# Altium PCB PCB1.PcbDoc (part 1 of 3)
Units mm, origin at the board's own origin, x right, y up, seen from the top; angles counter-clockwise.
Board outline 144.5 x 134 mm, 4 copper layers ([L1] Top, [L2] GND, [L3] POWER, [L4] BOTTOM), stack 1.584 mm thick; 275 components, 215 nets, 860 pads, 1046 vias.
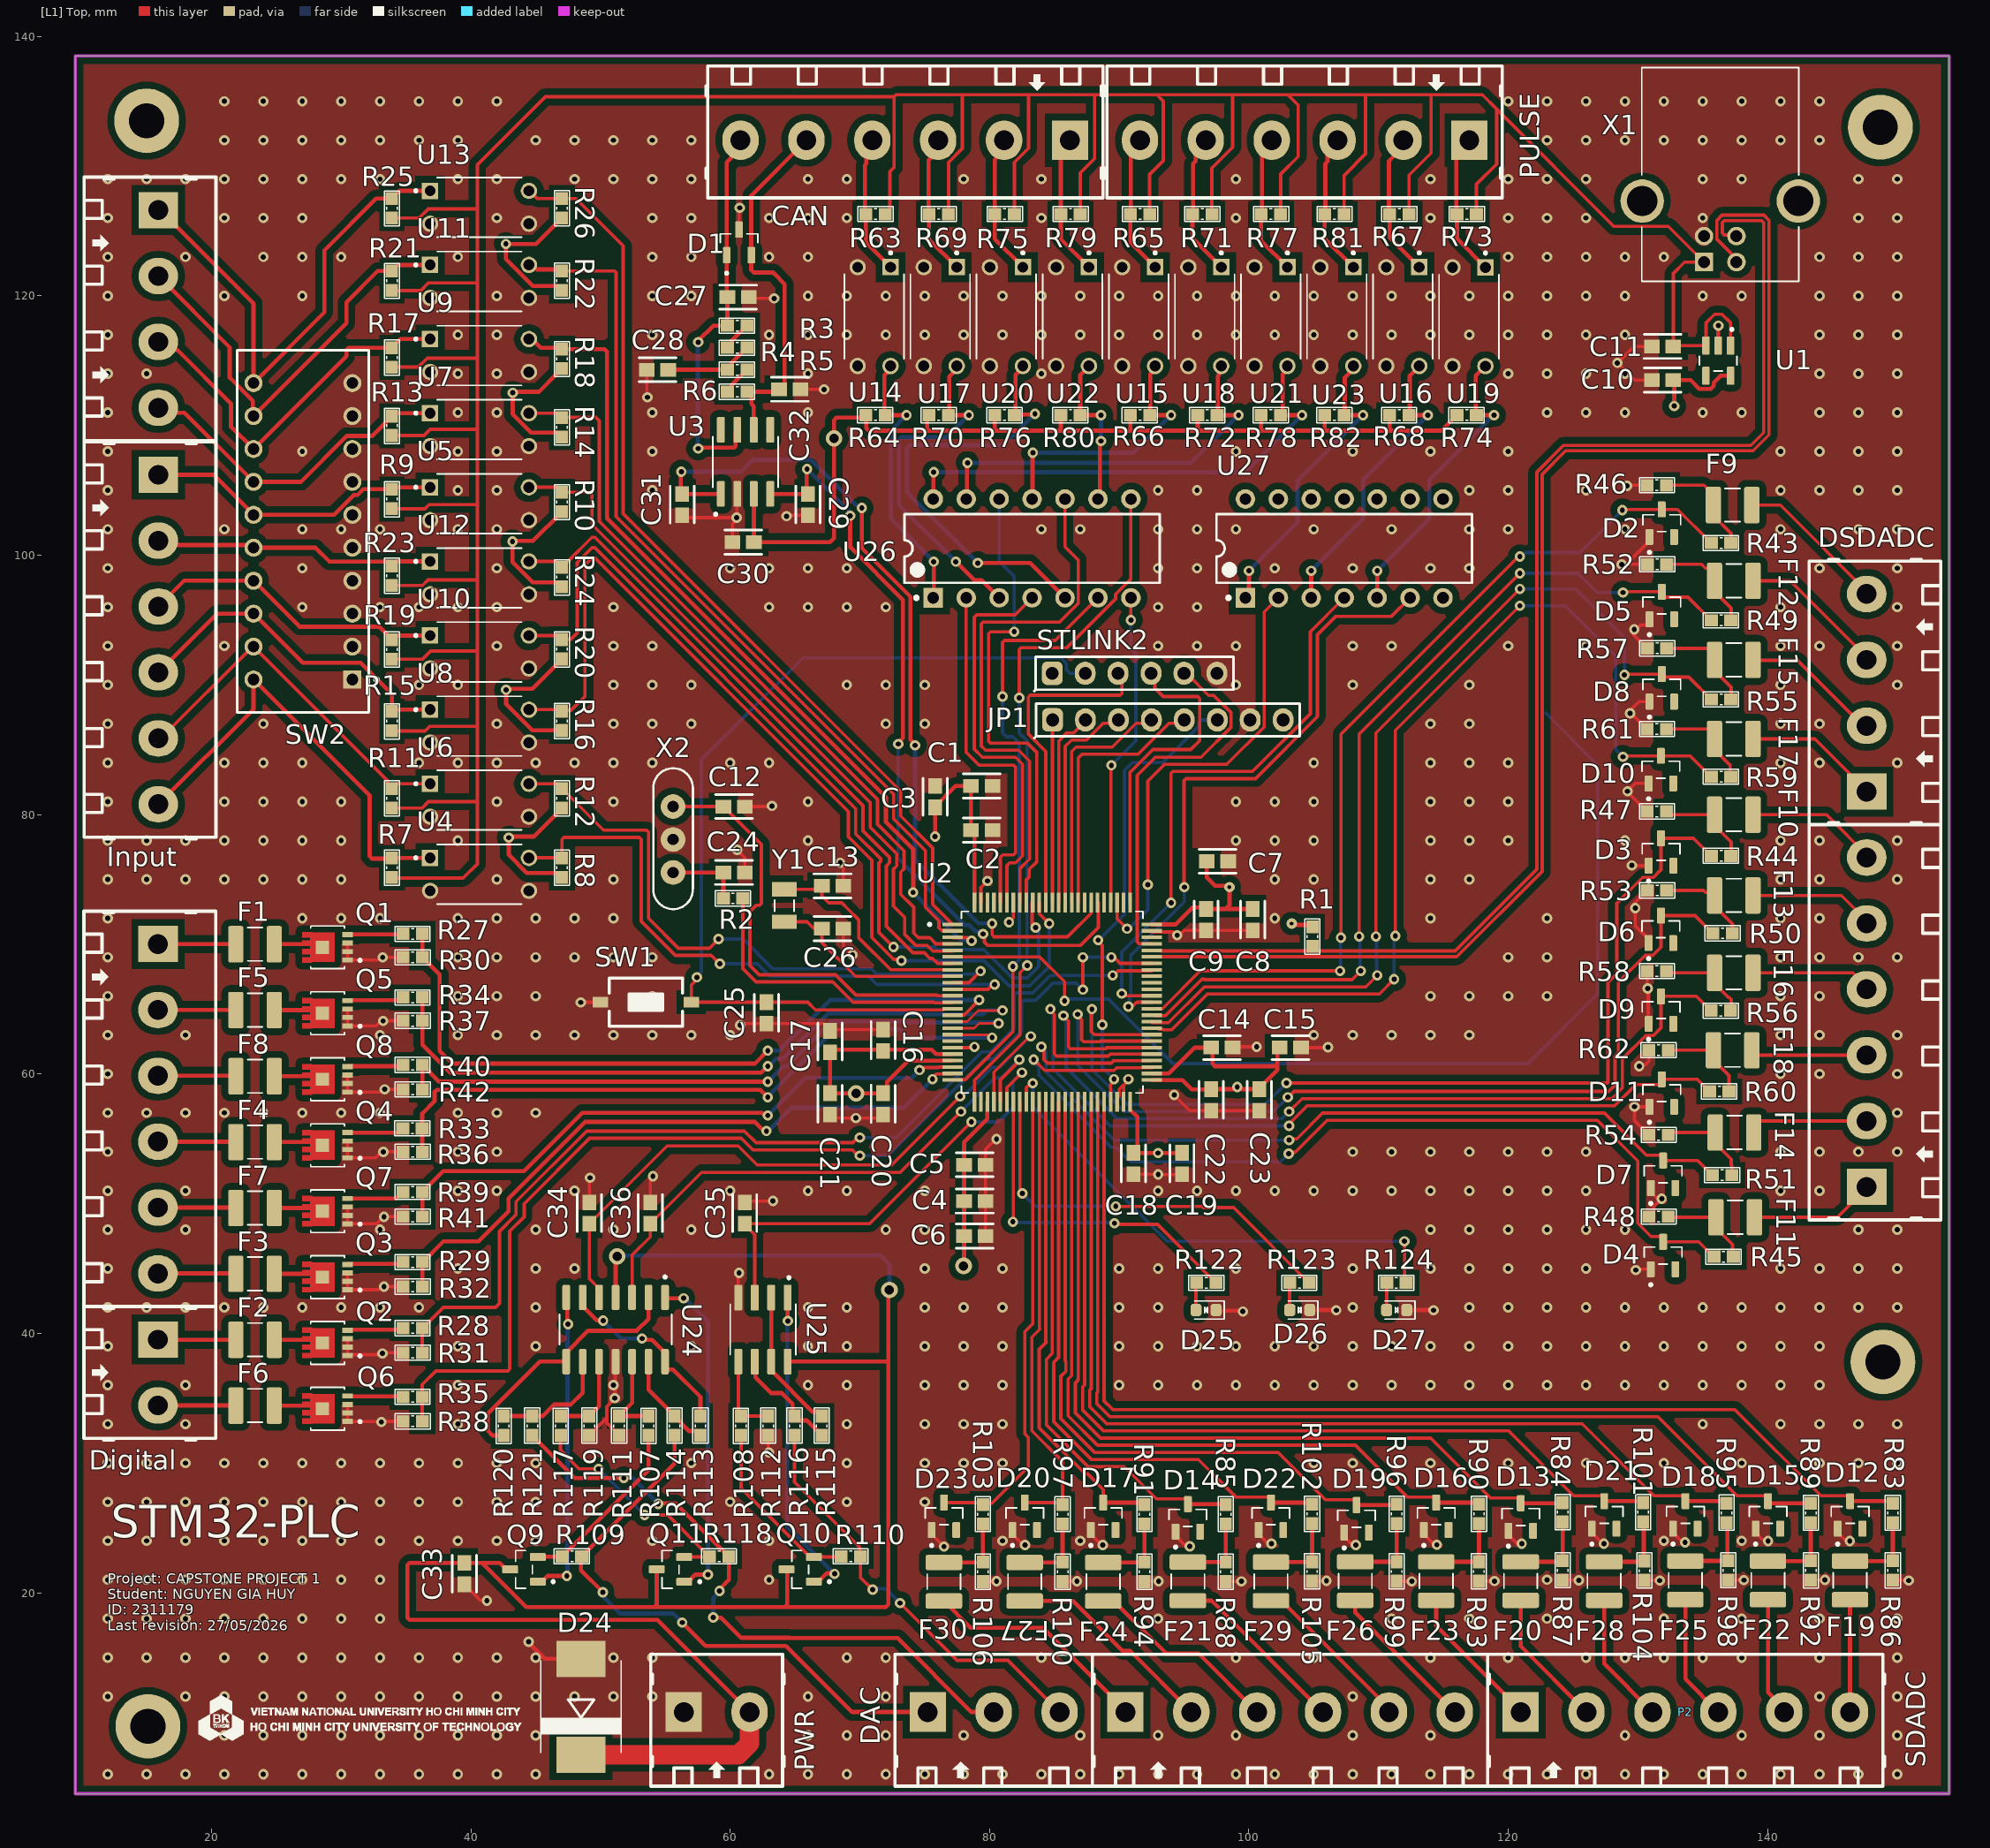
[diagram p0: [L1] Top view]
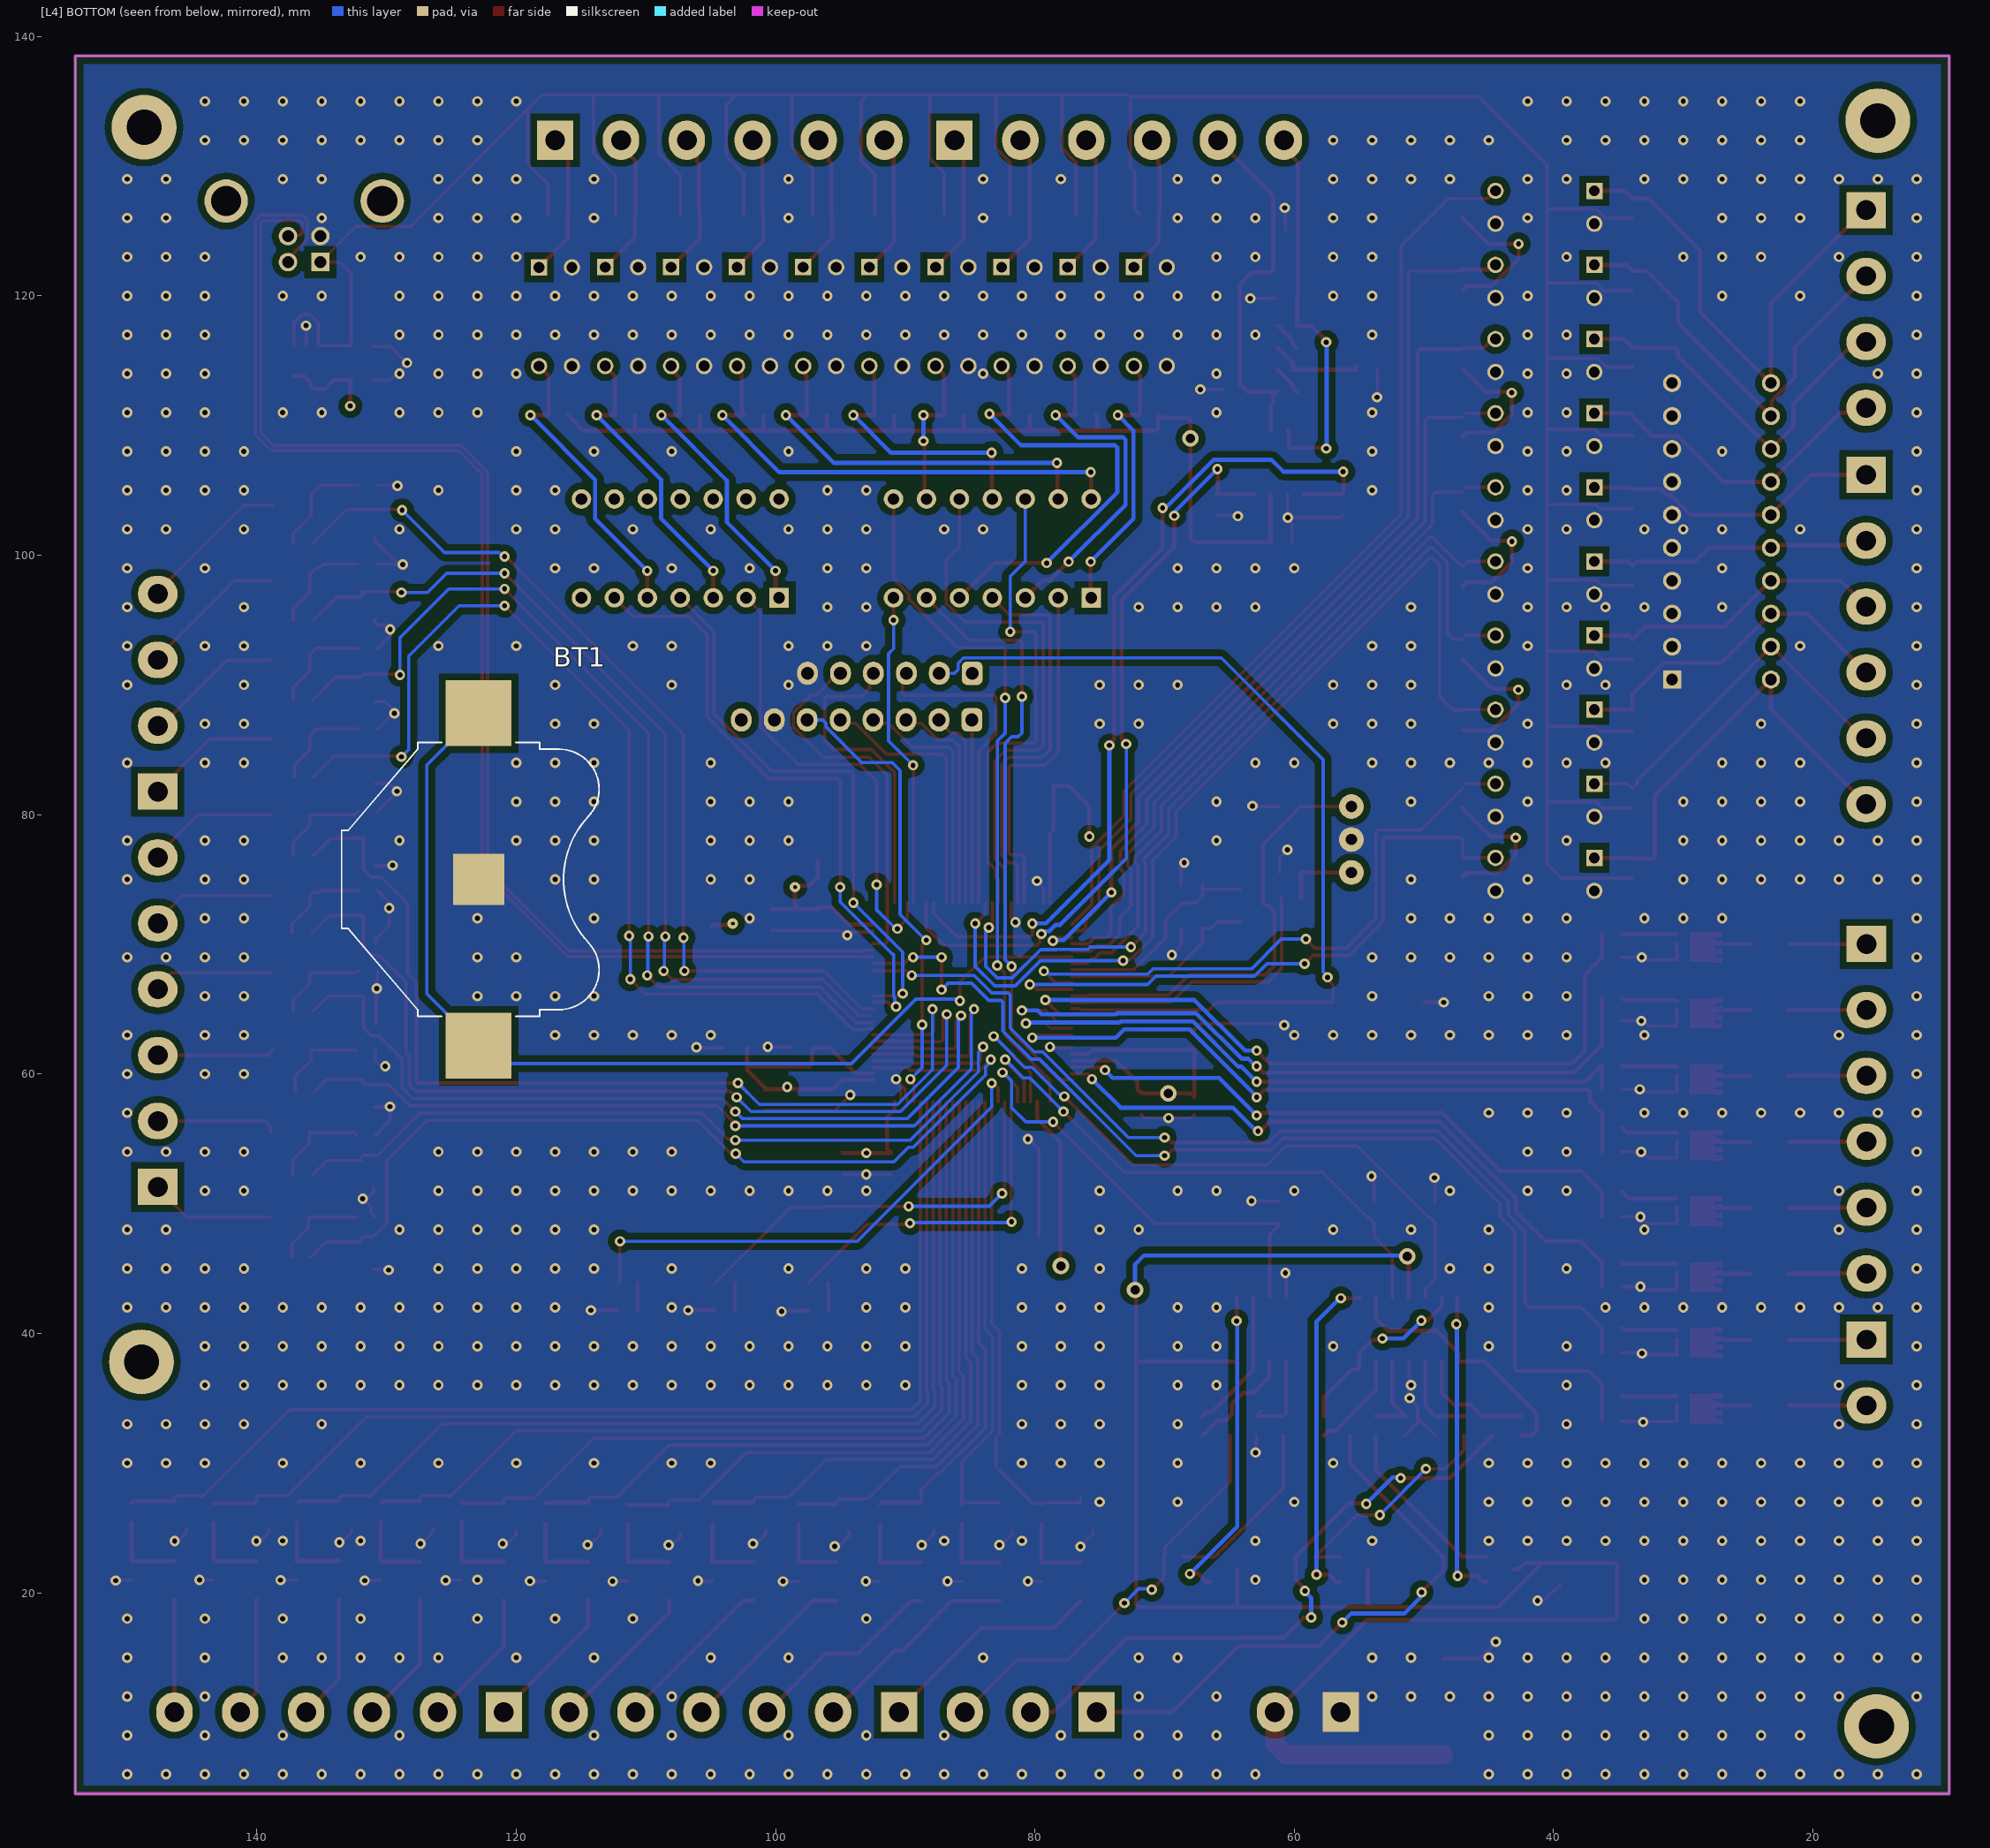
[diagram p1: [L4] BOTTOM view, seen from below]
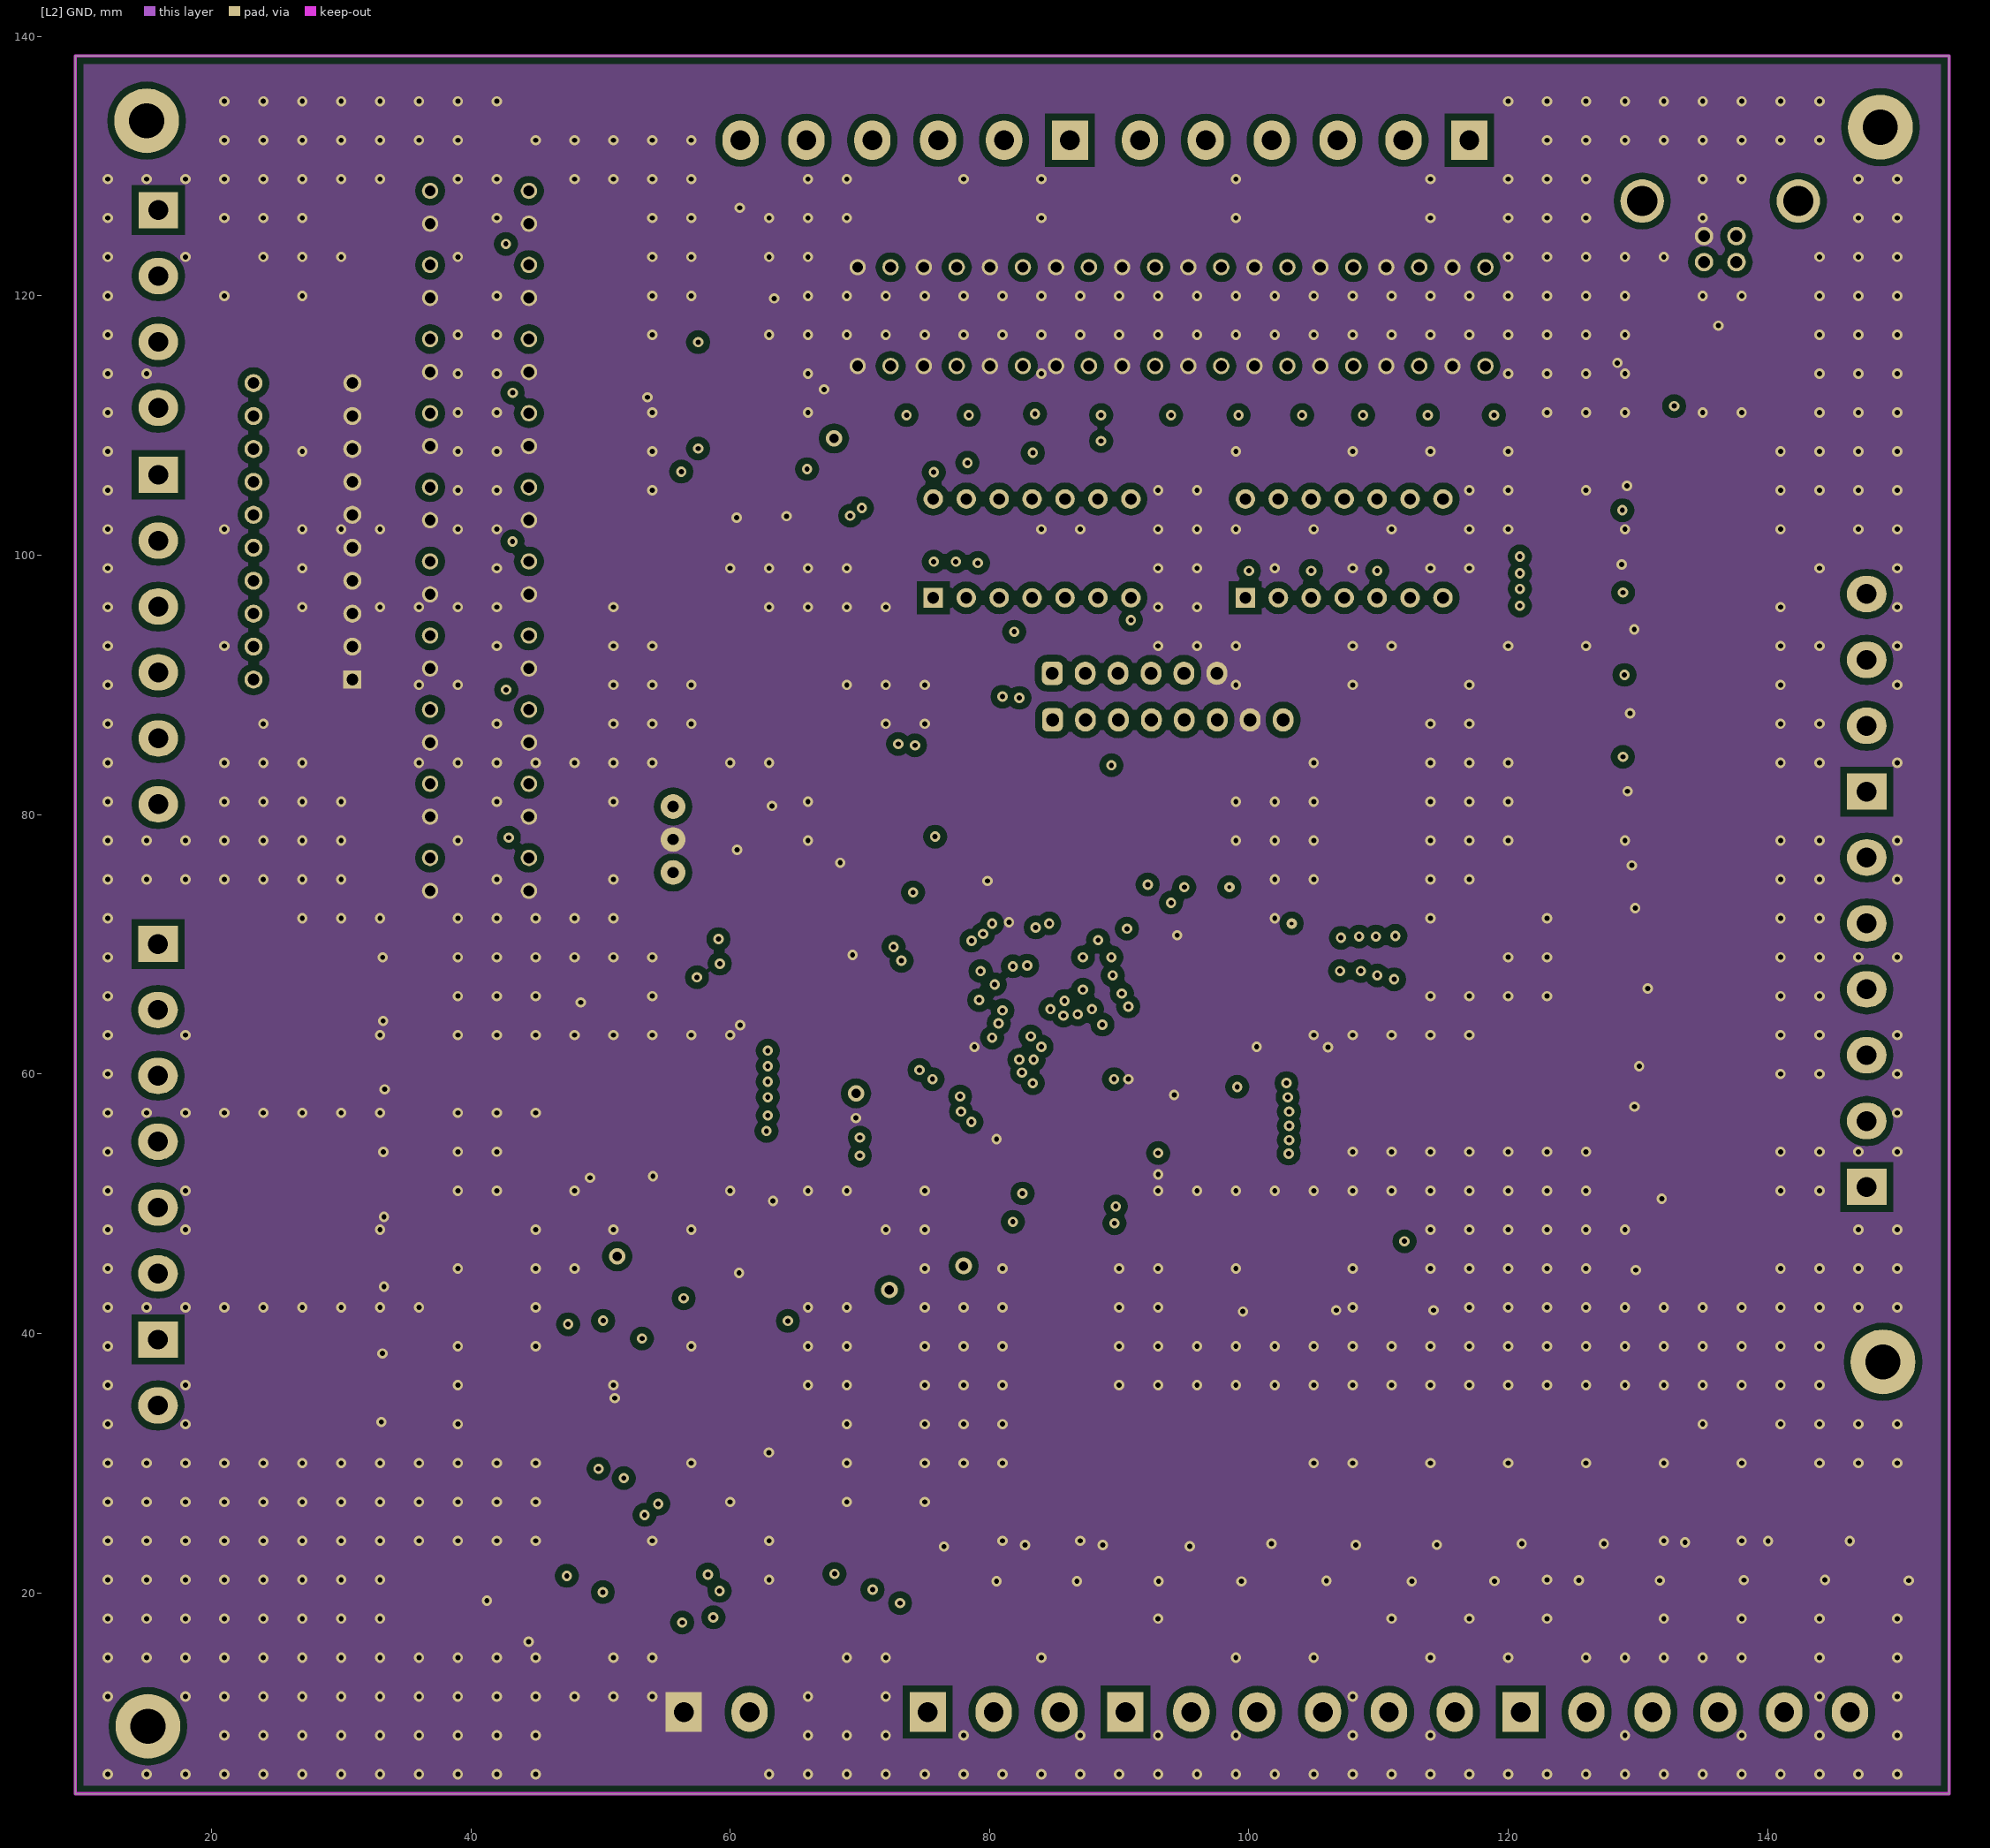
[diagram p2: [L2] GND]
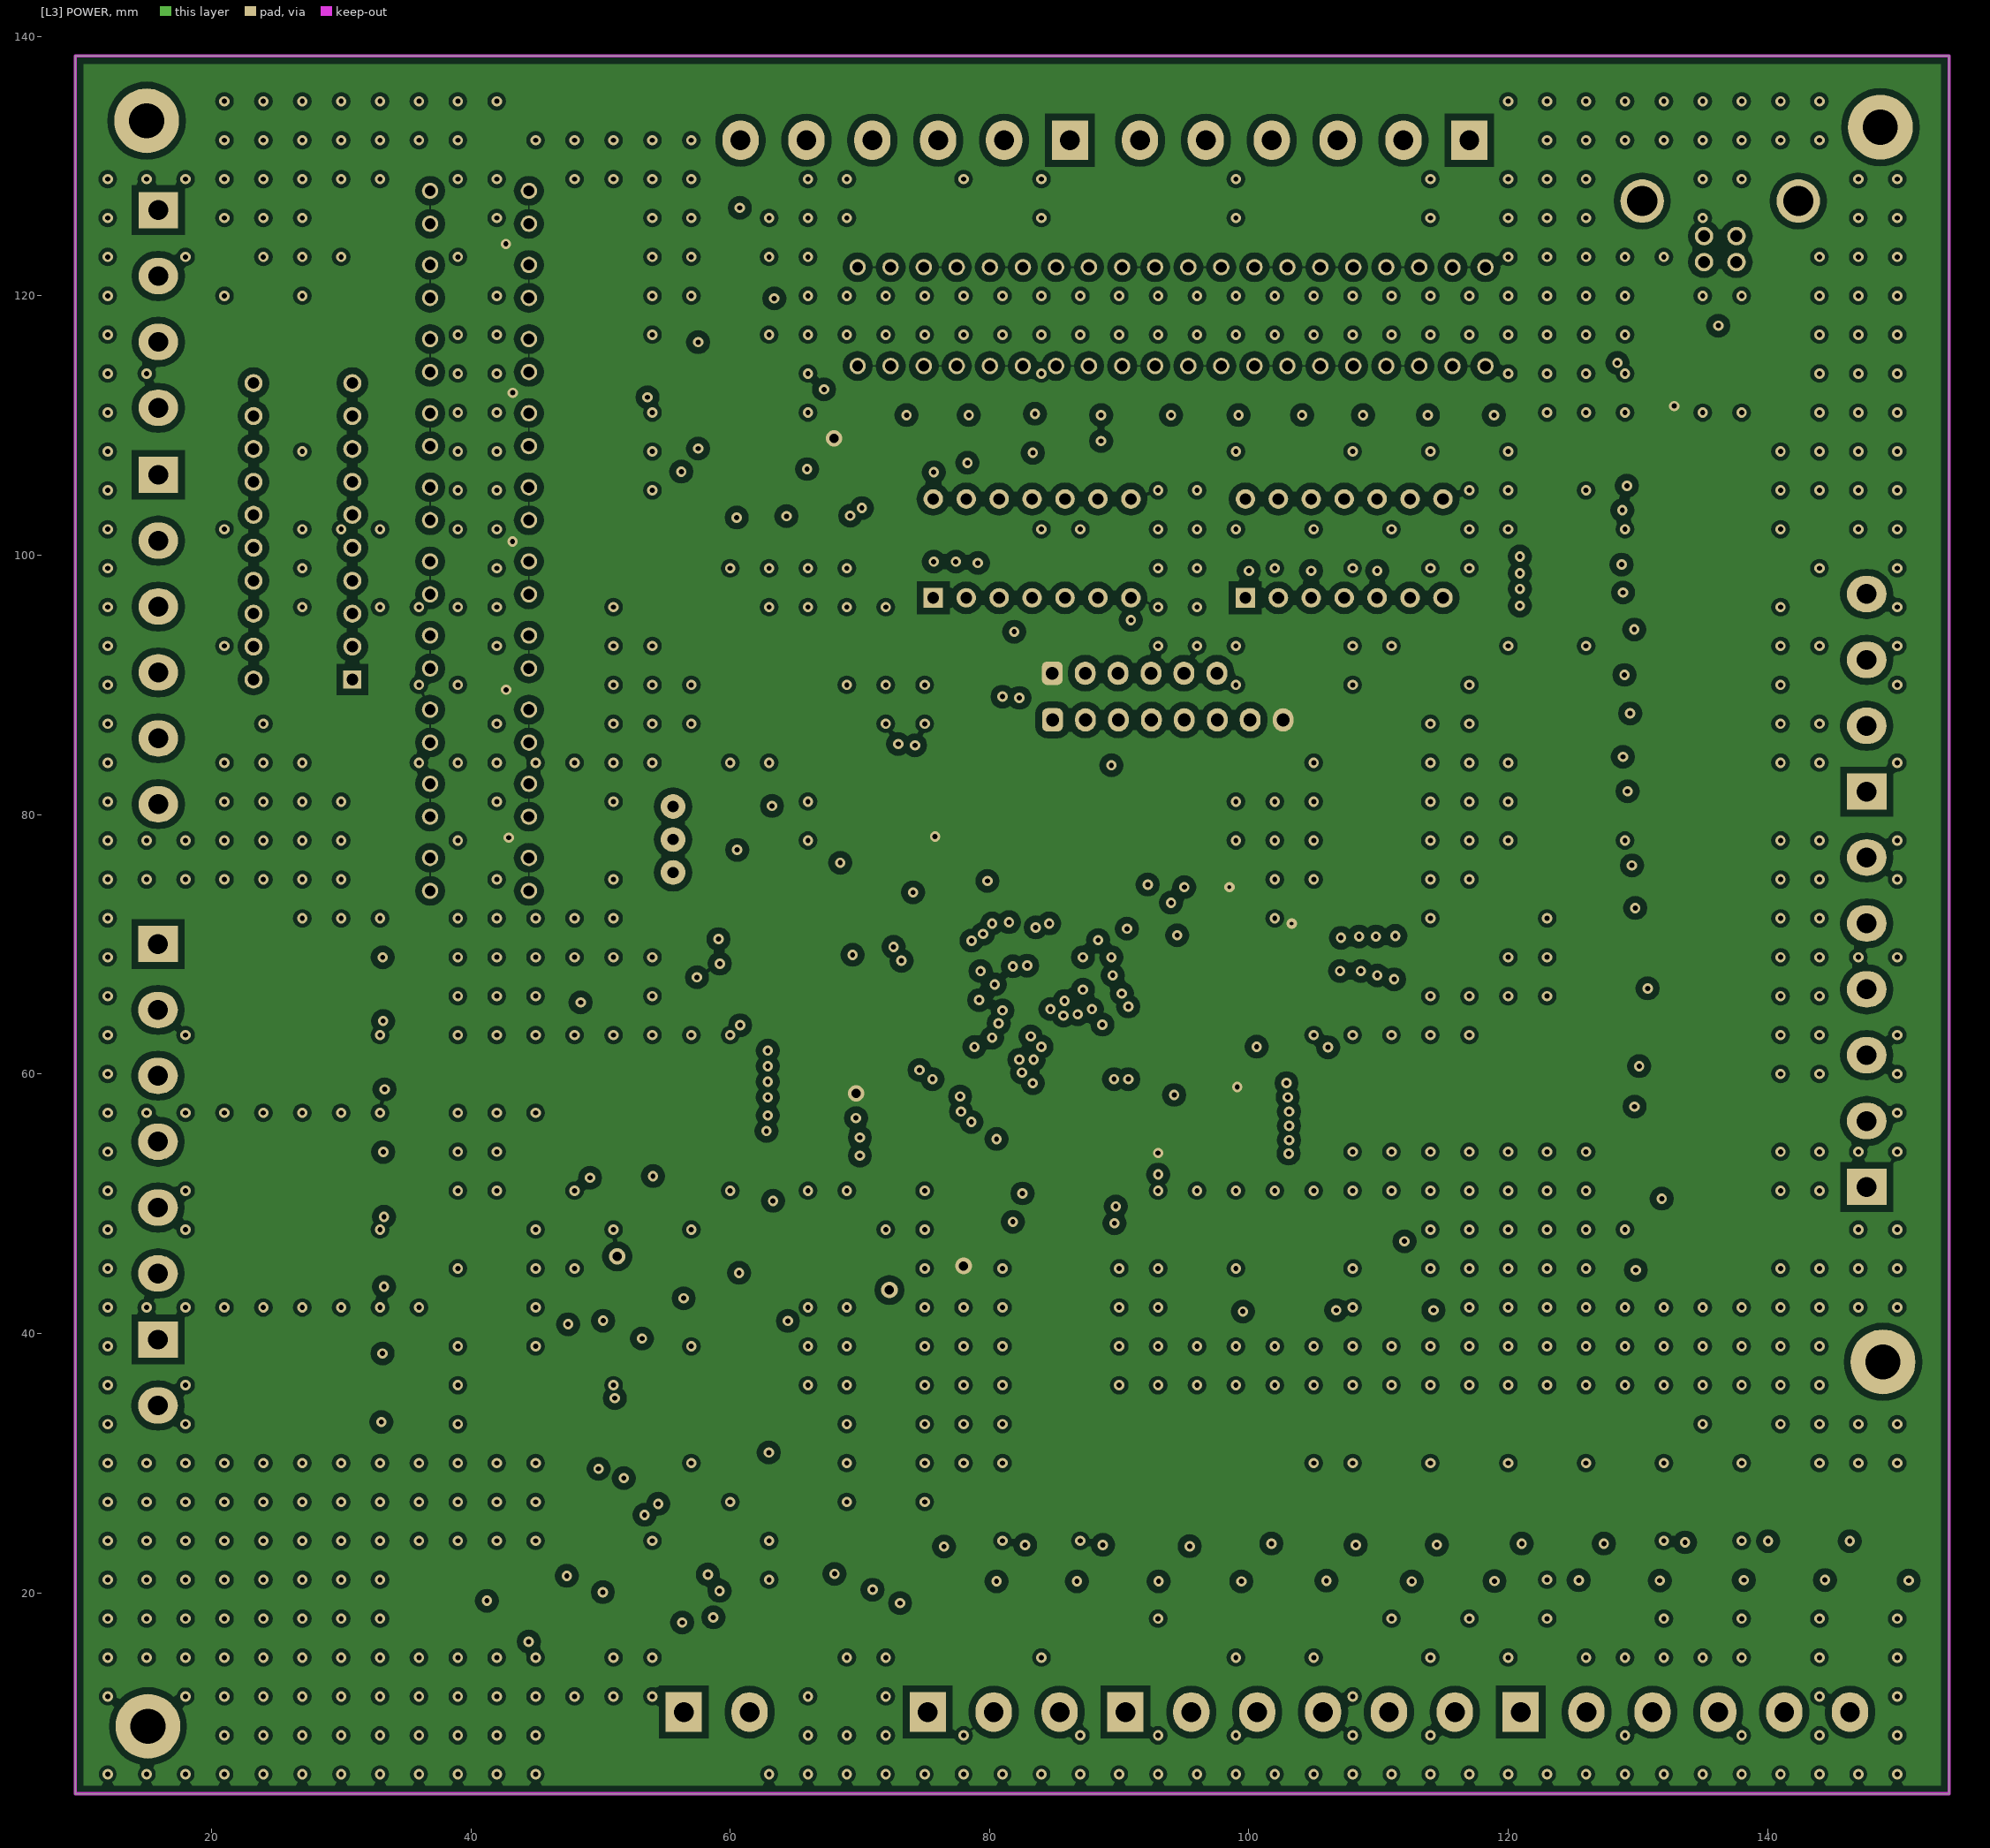
[diagram p3: [L3] POWER]

## Layer stack, top to bottom
Top Solder: solder mask 0.012, Solder Resist, Dk 4
[L1] Top: signal copper 0.04
Dielectric 1: prepreg 0.2, PP-006, Dk 4.5
[L2] GND: signal copper 0.032
Dielectric 2: dielectric 1.04, FR-4, Dk 4.6
[L3] POWER: signal copper 0.032
Dielectric 3: prepreg 0.2, PP-006, Dk 4.5
[L4] BOTTOM: signal copper 0.04
Bottom Solder: solder mask 0.012, Solder Resist, Dk 4

## Board outline
9.5,4.5 154,4.5 154,138.5 9.5,138.5

## Design rules (kind name [scope] priority, off if disabled: settings)
Clearance "Stitching GND_1" [IsStitchingVia and InNet('GND') vs (IsVia and (Not IsStitchingVia)) Or IsPad] p1: gap=0.127 ignorepadtopadclearanceinfootprint=FALSE
Clearance "Stitching GND" [IsStitchingVia and InNet('GND')] p2: gap=0.3 ignorepadtopadclearanceinfootprint=FALSE
Clearance "Clearence 0,508_Polygon" [InNamedPolygon('F.Cu-GND') OR InNamedPolygon('In1.Cu-GND') OR InNamedPolygon('In2.Cu-+3V3') OR InNamedPolygon('B.Cu-GND')] p3: gap=0.508 ignorepadtopadclearanceinfootprint=FALSE
DiffPairsRouting [All] p1: maxlimit=0.254 minlimit=0.254 mostfreqgap=0.254 toplayer_minwidth=0.381 toplayer_maxwidth=0.381 toplayer_prefwidth=0.381 midlayer1_minwidth=0.381 midlayer1_maxwidth=0.381 midlayer1_prefwidth=0.381 midlayer2_minwidth=0.381 midlayer2_maxwidth=0.381 midlayer2_prefwidth=0.381 bottomlayer_minwidth=0.381 bottomlayer_maxwidth=0.381 bottomlayer_prefwidth=0.381 maxuncoupledlength=12.7
HoleSize HoleSize_1 [All] p1: absolutevalues=TRUE maxlimit=2.7 minlimit=0.025 maxpercent=80.000 minpercent=20.000
MinimumSolderMaskSliver [All] p1: minsoldermaskwidth=0
PolygonConnect Polygon_B.Cu-GND_ConnectDirect [IsNamedPolygon('B.Cu-GND')] p1: connectstyle=Direct reliefconductorwidth=0.254 reliefentries=4 polygonreliefangle="90 Angle" airgapwidth=0.254
PolygonConnect Polygon_In2.Cu-+3V3_ConnectDirect [IsNamedPolygon('In2.Cu-+3V3')] p2: connectstyle=Direct reliefconductorwidth=0.254 reliefentries=4 polygonreliefangle="90 Angle" airgapwidth=0.254
PolygonConnect Polygon_In1.Cu-GND_ConnectDirect [IsNamedPolygon('In1.Cu-GND')] p3: connectstyle=Direct reliefconductorwidth=0.254 reliefentries=4 polygonreliefangle="90 Angle" airgapwidth=0.254
PolygonConnect Polygon_F.Cu-GND_ConnectDirect [IsNamedPolygon('F.Cu-GND')] p4: connectstyle=Direct reliefconductorwidth=0.254 reliefentries=4 polygonreliefangle="90 Angle" airgapwidth=0.254
RoutingVias [All] p1: holewidth=0.711 width=1.27 viastyle="Through Hole" minholewidth=0.4 minwidth=0.8 maxholewidth=0.711 maxwidth=1.27
SilkToSilkClearance [All] p1: silktosilkclearance=0
SilkToSolderMaskClearance [IsPad] p1: minsilkscreentomaskgap=0 clearancetoexposedcopper=TRUE
SolderMaskExpansion [All] p1: expansion=0.102 istentingtop=FALSE
Width [All] p1: maxlimit=10 minlimit=0.2 preferedwidth=0.25 minimp=50.000000 maximp=50.000000 favimp=50.000000
25 further rules are at their usual default settings.

## Classes and differential pairs
component class SDADC: D12 D13 D14 D15 D16 D17 D18 D19 D20 D21 D22 D23 F19 F20 F21 F22 F23 F24 F25 F26 F27 F28 F29 F30 R83 R84 R85 R86 R87 R88 R89 R90 R91 R92 R93 R94 R95 R96 R97 R98 R99 R100 R101 R102 R103 R104 R105 R106
component class PULSE: R63 R64 R65 R66 R67 R68 R69 R70 R71 R72 R73 R74 R75 R76 R77 R78 R79 R80 R81 R82 U14 U15 U16 U17 U18 U19 U20 U21 U22 U23 U26 U27
component class LED: D25 D26 D27 R122 R123 R124
component class INPUT: R7 R8 R9 R10 R11 R12 R13 R14 R15 R16 R17 R18 R19 R20 R21 R22 R23 R24 R25 R26 SW2 U4 U5 U6 U7 U8 U9 U10 U11 U12 U13
component class DSDADC: D2 D3 D4 D5 D6 D7 D8 D9 D10 D11 F9 F10 F11 F12 F13 F14 F15 F16 F17 F18 R43 R44 R45 R46 R47 R48 R49 R50 R51 R52 R53 R54 R55 R56 R57 R58 R59 R60 R61 R62
component class DIGTITAL: F1 F2 F3 F4 F5 F6 F7 F8 Q1 Q2 Q3 Q4 Q5 Q6 Q7 Q8 R27 R28 R29 R30 R31 R32 R33 R34 R35 R36 R37 R38 R39 R40 R41 R42
component class DAC: C33 C34 C35 C36 D24 Q9 Q10 Q11 R107 R108 R109 R110 R111 R112 R113 R114 R115 R116 R117 R118 R119 R120 R121 U25
component class STM32_PLC: BT1 C1 C2 C3 C4 C5 C6 C7 C8 C9 C10 C11 C12 C13 C14 C15 C16 C17 C18 C19 C20 C21 C22 C23 C24 C25 C26 JP1 R1 R2 SDADC STLINK2 SW1 U1 U2 USB X2 Y1
component class CAN: C27 C28 C29 C30 C31 C32 D1 R3 R4 R5 R6 U3
differential pair USB: +USB_P -USB_N

## Components (designator, comment, footprint, x,y, rotation, side; value= is the part's Value field where it differs from the comment)
BT1 "3002" BAT_3002 122.9,75 r270 bottom
C1 "100nF" FP-C0603C-CF-IPC_A 79.4,82.2 r180 top value=104
C2 "100nF" FP-C0603C-CF-IPC_A 79.4,78.8 r180 top value=104
C3 "4.7uF" FP-C0603C-CF-IPC_A 75.8,81.374 r270 top value=104
C4 "100nF" FP-C0603C-CF-IPC_A 78.862,50.2 r180 top value=104
C5 "100nF" FP-C0603C-CF-IPC_A 78.862,53 r180 top value=104
C6 "4.7uF" FP-C0603C-CF-IPC_A 78.862,47.5 r180 top value=104
C7 "100nF" FP-C0603C-CF-IPC_A 97.574,76.4 r180 top value=104
C8 "100nF" FP-C0603C-CF-IPC_A 100.3,71.9 r90 top value=104
C9 "4.7uF" FP-C0603C-CF-IPC_A 96.7,71.9 r90 top value=104
C10 "1uF" FP-C0603C-CF-IPC_A 131.9,113.5 r0 top value=104
C11 "1uF" FP-C0603C-CF-IPC_A 131.9,116.1 r0 top value=104
C12 "10pF" FP-C0603C-CF-IPC_A 60.3,80.618 r0 top value=104
C13 "4,7pF" FP-C0603C-CF-IPC_A 67.9,74.5 r0 top value=104
C14 "10nF" FP-C0603C-CF-IPC_A 97.926,62.032 r180 top value=104
C15 "1uF" FP-C0603C-CF-IPC_A 103.2,62.032 r180 top value=104
C16 "10nF" FP-C0603C-CF-IPC_A 71.8,62.6 r270 top value=104
C17 "1uF" FP-C0603C-CF-IPC_A 67.7,62.5 r270 top value=104
C18 "10nF" FP-C0603C-CF-IPC_A 91.1,53.1 r90 top value=104
C19 "1uF" FP-C0603C-CF-IPC_A 94.836,53.1 r90 top value=104
C20 "10nF" FP-C0603C-CF-IPC_A 71.8,57.7 r90 top value=104
C21 "1uF" FP-C0603C-CF-IPC_A 67.7,57.7 r90 top value=104
C22 "10nF" FP-C0603C-CF-IPC_A 97.1,58 r90 top value=104
C23 "1uF" FP-C0603C-CF-IPC_A 100.8,58 r90 top value=104
C24 "10pF" FP-C0603C-CF-IPC_A 60.3,75.538 r0 top value=104
C25 "100nF" FP-C0603C-CF-IPC_A 62.8,64.706 r270 top value=104
C26 "4,7pF" FP-C0603C-CF-IPC_A 67.9,71.2 r0 top value=104
C27 "10nF" FP-C0603C-CF-IPC_A 60.615,119.897 r180 top value=104
C28 "10nF" FP-C0603C-CF-IPC_A 54.4,114.3 r0 top value=104
C29 "10nF" FP-C0603C-CF-IPC_A 66,103.901 r270 top value=104
C30 "10nF" FP-C0603C-CF-IPC_A 60.996,101 r0 top value=104
C31 "10nF" FP-C0603C-CF-IPC_A 56.3,103.901 r90 top value=104
C32 "10nF" FP-C0603C-CF-IPC_A 64.6,112.8 r180 top value=104
C33 "100nF" FP-C0603C-CF-IPC_A 39.5,21.476 r270 top value=104
C34 "100nF" FP-C0603C-CF-IPC_A 49.135,49.273 r90 top value=104
C35 "100nF" FP-C0603C-CF-IPC_A 61.12,49.273 r90 top value=104
C36 "100nF" FP-C0603C-CF-IPC_A 53.835,49.273 r90 top value=104
CAN "Screw_terminal 1x6" HDR/Terminal/6 73.5,132 r180 top (schematic designator P1)
D1 "PESD5V0L2BT,215" SOT95P230X110-3N 60.679,124.124 r90 top
D2 "BZX84C3V6LT1G" SOT95P240X111-3N 131.843,102.47 r90 top
D3 "BZX84C3V6LT1G" SOT95P240X111-3N 131.782,77.114 r90 top
D4 "BZX84C3V6LT1G" SOT95P240X111-3N 131.943,46 r90 top
D5 "BZX84C3V6LT1G" SOT95P240X111-3N 131.843,96.12 r90 top
D6 "BZX84C3V6LT1G" SOT95P240X111-3N 131.777,71.145 r90 top
D7 "BZX84C3V6LT1G" SOT95P240X111-3N 131.943,52.265 r90 top
D8 "BZX84C3V6LT1G" SOT95P240X111-3N 131.843,89.77 r90 top
D9 "BZX84C3V6LT1G" SOT95P240X111-3N 131.782,64.922 r90 top
D10 "BZX84C3V6LT1G" SOT95P240X111-3N 131.777,83.464 r90 top
D11 "BZX84C3V6LT1G" SOT95P240X111-3N 131.843,58.528 r90 top
D12 "BZX84C3V6LT1G" SOT95P240X111-3N 146.36,26 r90 top
D13 "BZX84C3V6LT1G" SOT95P240X111-3N 120.96,25.839 r90 top
D14 "BZX84C3V6LT1G" SOT95P240X111-3N 95.296,25.77 r90 top
D15 "BZX84C3V6LT1G" SOT95P240X111-3N 140.029,26 r90 top
D16 "BZX84C3V6LT1G" SOT95P240X111-3N 114.446,25.89 r90 top
D17 "BZX84C3V6LT1G" SOT95P240X111-3N 88.765,25.89 r90 top
D18 "BZX84C3V6LT1G" SOT95P240X111-3N 133.66,26 r90 top
D19 "BZX84C3V6LT1G" SOT95P240X111-3N 108.3,25.7 r90 top
D20 "BZX84C3V6LT1G" SOT95P240X111-3N 82.715,25.89 r90 top
D21 "BZX84C3V6LT1G" SOT95P240X111-3N 127.4,26 r90 top
D22 "BZX84C3V6LT1G" SOT95P240X111-3N 101.7,25.89 r90 top
D23 "BZX84C3V6LT1G" SOT95P240X111-3N 76.484,25.89 r90 top
D24 "B560C-13-F" SMC 48.5,11.2 r90 top
D25 "LED_USB_RX_TX" WL-SMCW_0603_150060xx75000 96.7,41.8 r180 top
D26 "LED_CAN_RX_TX" WL-SMCW_0603_150060xx75000 103.923,41.8 r180 top
D27 "LED_ERROR" WL-SMCW_0603_150060xx75000 111.4,41.8 r180 top
DAC "Screw_terminal 1x3" HDR/Terminal/3 80.32,10.8 r0 top (schematic designator P4)
Digital "Screw_terminal 1x6" HDR/Terminal/6 15.876,57.318 r270 top (schematic designator P6)
DSDADC "Screw_terminal 1x4" HDR/Terminal/4 147.645,89.389 r90 top (schematic designator P5)
F1 "0ZCH0150FF2E" FUSC3225X90N 23.358,70.006 r0 top
F2 "0ZCH0150FF2E" FUSC3225X90N 23.358,39.506 r0 top
F3 "0ZCH0150FF2E" FUSC3225X90N 23.358,44.586 r0 top
F4 "0ZCH0150FF2E" FUSC3225X90N 23.358,54.746 r0 top
F5 "0ZCH0150FF2E" FUSC3225X90N 23.358,64.926 r0 top
F6 "0ZCH0150FF2E" FUSC3225X90N 23.358,34.426 r0 top
F7 "0ZCH0150FF2E" FUSC3225X90N 23.358,49.666 r0 top
F8 "0ZCH0150FF2E" FUSC3225X90N 23.358,59.826 r0 top
F9 "0ZCH0150FF2E" FUSC3225X90N 137.304,103.867 r0 top
F10 "0ZCH0150FF2E" FUSC3225X90N 137.392,79.991 r0 top
F11 "0ZCH0150FF2E" FUSC3225X90N 137.504,48.953 r0 top
F12 "0ZCH0150FF2E" FUSC3225X90N 137.392,98.025 r0 top
F13 "0ZCH0150FF2E" FUSC3225X90N 137.392,73.768 r0 top
F14 "0ZCH0150FF2E" FUSC3225X90N 137.443,55.484 r0 top
F15 "0ZCH0150FF2E" FUSC3225X90N 137.392,91.929 r0 top
F16 "0ZCH0150FF2E" FUSC3225X90N 137.392,67.799 r0 top
F17 "0ZCH0150FF2E" FUSC3225X90N 137.392,85.833 r0 top
F18 "0ZCH0150FF2E" FUSC3225X90N 137.304,61.83 r0 top
F19 "0ZCH0150FF2E" FUSC3225X90N 146.36,20.954 r270 top
F20 "0ZCH0150FF2E" FUSC3225X90N 120.96,20.9 r270 top
F21 "0ZCH0150FF2E" FUSC3225X90N 95.296,20.873 r270 top
F22 "0ZCH0150FF2E" FUSC3225X90N 140.029,20.954 r270 top
F23 "0ZCH0150FF2E" FUSC3225X90N 114.446,20.9 r270 top
F24 "0ZCH0150FF2E" FUSC3225X90N 88.765,20.846 r270 top
F25 "0ZCH0150FF2E" FUSC3225X90N 133.66,20.961 r270 top
F26 "0ZCH0150FF2E" FUSC3225X90N 108.2,20.9 r270 top
F27 "0ZCH0150FF2E" FUSC3225X90N 82.715,20.846 r270 top
F28 "0ZCH0150FF2E" FUSC3225X90N 127.4,20.9 r270 top
F29 "0ZCH0150FF2E" FUSC3225X90N 101.7,20.873 r270 top
F30 "0ZCH0150FF2E" FUSC3225X90N 76.484,20.846 r270 top
Input "Screw_terminal 1x6" HDR/Terminal/6 15.9,93.5 r270 top (schematic designator P11)
JP1 "JP8" HDR/Header/8 93.75,87.3 r0 top value="Connector 8"
P2 "Screw_terminal 1x6" HDR/Terminal/6 133.66,10.8 r0 top
P8 "Screw_terminal 1x6" HDR/Terminal/6 147.645,63.989 r90 top
P9 "Screw_terminal 1x2" HDR/Terminal/2 15.876,36.978 r270 top
P10 "Screw_terminal 1x4" HDR/Terminal/4 15.9,118.988 r270 top
PULSE "Screw_terminal 1x6" HDR/Terminal/6 104.3,132 r180 top (schematic designator P7)
PWR "Screw_terminal 1x2" HDR/Terminal/2 58.96,10.8 r0 top (schematic designator P12)
Q1 "BUK9M15-60EX" TRANS_BUK9M15-60EX 28.954,69.762 r180 top
Q2 "BUK9M15-60EX" TRANS_BUK9M15-60EX 28.954,39.262 r180 top
Q3 "BUK9M15-60EX" TRANS_BUK9M15-60EX 28.954,44.342 r180 top
Q4 "BUK9M15-60EX" TRANS_BUK9M15-60EX 28.954,54.502 r180 top
Q5 "BUK9M15-60EX" TRANS_BUK9M15-60EX 28.954,64.682 r180 top
Q6 "BUK9M15-60EX" TRANS_BUK9M15-60EX 28.954,34.194 r180 top
Q7 "BUK9M15-60EX" TRANS_BUK9M15-60EX 28.954,49.422 r180 top
Q8 "BUK9M15-60EX" TRANS_BUK9M15-60EX 28.954,59.582 r180 top
Q9 "BC847C-QR" SOT95P240X111-3N 44.1,21.8 r180 top
Q10 "BC847C-QR" SOT95P240X111-3N 65.4,21.8 r180 top
Q11 "BC847C-QR" SOT95P240X111-3N 55.4,21.8 r180 top
R1 "1,5k" "tro smd 0603" 104.9,70.6 r270 top
R2 "2k" "tro smd 0603" 60.224,73.538 r180 top
R3 "0" "tro smd 0603" 60.539,117.7 r180 top
R4 "60" "tro smd 0603" 60.539,116 r180 top
R5 "0" "tro smd 0603" 60.539,114.3 r180 top
R6 "60" "tro smd 0603" 60.539,112.6 r180 top
R7 "1k" "tro smd 0603" 33.915,75.912 r270 top
R8 "1k" "tro smd 0603" 47.025,75.912 r270 top
R9 "1k" "tro smd 0603" 33.915,104.333 r270 top
R10 "1k" "tro smd 0603" 47.025,104.103 r270 top
R11 "1k" "tro smd 0603" 33.915,81.253 r270 top
R12 "1k" "tro smd 0603" 47.025,81.253 r270 top
R13 "1k" "tro smd 0603" 33.915,109.983 r270 top
R14 "1k" "tro smd 0603" 47.025,109.868 r270 top
R15 "1k" "tro smd 0603" 33.915,87.203 r270 top
R16 "1k" "tro smd 0603" 47.025,87.227 r270 top
R17 "1k" "tro smd 0603" 33.915,115.25 r270 top
R18 "1k" "tro smd 0603" 47.025,115.135 r270 top
R19 "1k" "tro smd 0603" 33.915,92.736 r270 top
R20 "1k" "tro smd 0603" 47.025,92.748 r270 top
R21 "1k" "tro smd 0603" 33.915,121.161 r270 top
R22 "1k" "tro smd 0603" 47.025,121.173 r270 top
R23 "1k" "tro smd 0603" 33.915,98.421 r270 top
R24 "1k" "tro smd 0603" 47.025,98.306 r270 top
R25 "1k" "tro smd 0603" 33.915,126.75 r270 top
R26 "1k" "tro smd 0603" 47.025,126.762 r270 top
R27 "160" "tro smd 0603" 35.51,70.8 r180 top
R28 "160" "tro smd 0603" 35.51,40.4 r180 top
R29 "160" "tro smd 0603" 35.51,45.5 r180 top
R30 "10k" "tro smd 0603" 35.51,69 r0 top
R31 "10k" "tro smd 0603" 35.51,38.5 r0 top
R32 "10k" "tro smd 0603" 35.51,43.6 r0 top
R33 "160" "tro smd 0603" 35.5,55.8 r180 top
R34 "160" "tro smd 0603" 35.51,65.9 r180 top
R35 "160" "tro smd 0603" 35.51,35.1 r180 top
R36 "10k" "tro smd 0603" 35.51,54 r0 top
R37 "10k" "tro smd 0603" 35.51,64.1 r0 top
R38 "10k" "tro smd 0603" 35.51,33.219 r0 top
R39 "160" "tro smd 0603" 35.51,50.9 r180 top
R40 "160" "tro smd 0603" 35.51,60.7 r180 top
R41 "10k" "tro smd 0603" 35.51,49 r0 top
R42 "10k" "tro smd 0603" 35.51,58.8 r0 top
R43 "160" "tro smd 0603" 136.415,100.946 r180 top
R44 "160" "tro smd 0603" 136.415,76.816 r180 top
R45 "160" "tro smd 0603" 136.615,45.905 r180 top
R46 "160" "tro smd 0603" 131.462,105.391 r0 top
R47 "160" "tro smd 0603" 131.462,80.245 r0 top
R48 "160" "tro smd 0603" 131.6,49 r0 top
R49 "160" "tro smd 0603" 136.415,94.977 r180 top
R50 "160" "tro smd 0603" 136.53,70.847 r180 top
R51 "160" "tro smd 0603" 136.5,52.2 r180 top
R52 "160" "tro smd 0603" 131.474,99.295 r0 top
R53 "160" "tro smd 0603" 131.474,74.149 r0 top
R54 "160" "tro smd 0603" 131.6,55.3 r0 top
R55 "160" "tro smd 0603" 136.415,88.881 r180 top
R56 "160" "tro smd 0603" 136.403,64.878 r180 top
R57 "160" "tro smd 0603" 131.474,92.818 r0 top
R58 "160" "tro smd 0603" 131.462,67.926 r0 top
R59 "160" "tro smd 0603" 136.415,82.912 r180 top
R60 "160" "tro smd 0603" 136.276,58.655 r180 top
R61 "160" "tro smd 0603" 131.462,86.595 r0 top
R62 "160" "tro smd 0603" 131.589,61.83 r0 top
R63 "1k" "tro smd 0603" 71.2,126.3 r0 top
R64 "1k" "tro smd 0603" 71.2,110.8 r180 top
R65 "1k" "tro smd 0603" 91.6,126.3 r0 top
R66 "1k" "tro smd 0603" 91.6,110.8 r180 top
R67 "1k" "tro smd 0603" 111.6,126.3 r0 top
R68 "1k" "tro smd 0603" 111.6,110.8 r180 top
R69 "1k" "tro smd 0603" 76.085,126.3 r0 top
R70 "1k" "tro smd 0603" 76.085,110.8 r180 top
R71 "1k" "tro smd 0603" 96.4,126.3 r0 top
R72 "1k" "tro smd 0603" 96.8,110.8 r180 top
R73 "1k" "tro smd 0603" 116.8,126.3 r0 top
R74 "1k" "tro smd 0603" 116.8,110.8 r180 top
R75 "1k" "tro smd 0603" 81.165,126.3 r0 top
R76 "1k" "tro smd 0603" 81.165,110.8 r180 top
R77 "1k" "tro smd 0603" 101.7,126.3 r0 top
R78 "1k" "tro smd 0603" 101.7,110.8 r180 top
R79 "1k" "tro smd 0603" 86.245,126.3 r0 top
R80 "1k" "tro smd 0603" 86.245,110.8 r180 top
R81 "1k" "tro smd 0603" 106.6,126.3 r0 top
R82 "1k" "tro smd 0603" 106.6,110.8 r180 top
R83 "160" "tro smd 0603" 149.662,26.149 r90 top
R84 "160" "tro smd 0603" 124.2,26.2 r90 top
R85 "160" "tro smd 0603" 98.217,26.053 r90 top
R86 "160" "tro smd 0603" 149.662,21.716 r90 top
R87 "160" "tro smd 0603" 124.2,21.723 r90 top
R88 "160" "tro smd 0603" 98.217,21.608 r90 top
R89 "160" "tro smd 0603" 143.331,26.149 r90 top
R90 "160" "tro smd 0603" 117.748,26.08 r90 top
R91 "160" "tro smd 0603" 91.94,26.053 r90 top
R92 "160" "tro smd 0603" 143.331,21.716 r90 top
R93 "160" "tro smd 0603" 117.736,21.635 r90 top
R94 "160" "tro smd 0603" 91.94,21.608 r90 top
R95 "160" "tro smd 0603" 136.835,26.156 r90 top
R96 "160" "tro smd 0603" 111.398,26.08 r90 top
R97 "160" "tro smd 0603" 85.636,26.053 r90 top
R98 "160" "tro smd 0603" 136.962,21.723 r90 top
R99 "160" "tro smd 0603" 111.398,21.635 r90 top
R100 "160" "tro smd 0603" 85.636,21.608 r90 top
R101 "160" "tro smd 0603" 130.4,26.2 r90 top
R102 "160" "tro smd 0603" 104.875,26.08 r90 top
R103 "160" "tro smd 0603" 79.488,26.053 r90 top
R104 "160" "tro smd 0603" 130.5,21.7 r90 top
R105 "160" "tro smd 0603" 104.875,21.635 r90 top
R106 "160" "tro smd 0603" 79.488,21.608 r90 top
R107 "10k" "tro smd 0603" 53.705,32.869 r270 top
R108 "10k" "tro smd 0603" 60.83,32.869 r270 top
R109 "160" "tro smd 0603" 47.8,22.8 r180 top
R110 "160" "tro smd 0603" 69.3,22.8 r180 top
R111 "10k" "tro smd 0603" 51.435,32.869 r90 top
R112 "10k" "tro smd 0603" 62.93,32.869 r90 top
R113 "10k" "tro smd 0603" 57.705,32.869 r90 top
R114 "10k" "tro smd 0603" 55.705,32.869 r90 top
R115 "10k" "tro smd 0603" 67.065,32.869 r90 top
R116 "10k" "tro smd 0603" 64.965,32.869 r90 top
R117 "10k" "tro smd 0603" 46.935,32.869 r270 top
R118 "160" "tro smd 0603" 59.15,22.8 r180 top
R119 "10k" "tro smd 0603" 49.135,32.869 r90 top
R120 "10k" "tro smd 0603" 42.535,32.869 r270 top
R121 "10k" "tro smd 0603" 44.735,32.869 r90 top
R122 "220" "tro smd 0603" 96.725,43.9 r180 top
R123 "220" "tro smd 0603" 103.898,43.9 r180 top
R124 "220" "tro smd 0603" 111.375,43.9 r180 top
SDADC "Screw_terminal 1x6" HDR/Terminal/6 103.18,10.8 r0 top (schematic designator P3)
STLINK2 "ST-Link V2 connector" HDR/Header/6 91.186,90.9 r0 top
SW1 "SW" SW1-SMD 53.5,65.532 r0 top value="SW chip 2 pin"
SW2 "4-5435640-1" FP-4-5435640-1-MFG 27.052,101.843 r180 top
U1 "MIC5504-3.3YM5_TR" SOT95P280X145-5N 136.2,115 r270 top
U2 "STM32F373VBTx" QFP50P1600X1600X160-100N 84.836,65.532 r0 top
U3 "TCAN332D" SOIC127P599X175-8N 61.187,107.197 r90 top
U4 "PC817X3NSZ1B" DIP762W50P254L495H455Q4 40.67,75.392 r0 top
U5 "PC817X3NSZ1B" DIP762W50P254L495H455Q4 40.67,103.967 r0 top
U6 "PC817X3NSZ1B" DIP762W50P254L495H455Q4 40.67,81.107 r0 top
U7 "PC817X3NSZ1B" DIP762W50P254L495H455Q4 40.67,109.682 r0 top
U8 "PC817X3NSZ1B" DIP762W50P254L495H455Q4 40.67,86.822 r0 top
U9 "PC817X3NSZ1B" DIP762W50P254L495H455Q4 40.67,115.397 r0 top
U10 "PC817X3NSZ1B" DIP762W50P254L495H455Q4 40.67,92.537 r0 top
U11 "PC817X3NSZ1B" DIP762W50P254L495H455Q4 40.67,121.112 r0 top
U12 "PC817X3NSZ1B" DIP762W50P254L495H455Q4 40.67,98.252 r0 top
U13 "PC817X3NSZ1B" DIP762W50P254L495H455Q4 40.67,126.827 r0 top
U14 "PC817X3NSZ1B" DIP762W50P254L495H455Q4 71.1,118.4 r270 top
U15 "PC817X3NSZ1B" DIP762W50P254L495H455Q4 91.5,118.4 r270 top
U16 "PC817X3NSZ1B" DIP762W50P254L495H455Q4 111.87,118.4 r270 top
U17 "PC817X3NSZ1B" DIP762W50P254L495H455Q4 76.2,118.4 r270 top
U18 "PC817X3NSZ1B" DIP762W50P254L495H455Q4 96.6,118.4 r270 top
U19 "PC817X3NSZ1B" DIP762W50P254L495H455Q4 116.97,118.39 r270 top
U20 "PC817X3NSZ1B" DIP762W50P254L495H455Q4 81.3,118.4 r270 top
U21 "PC817X3NSZ1B" DIP762W50P254L495H455Q4 101.7,118.4 r270 top
U22 "PC817X3NSZ1B" DIP762W50P254L495H455Q4 86.4,118.4 r270 top
U23 "PC817X3NSZ1B" DIP762W50P254L495H455Q4 106.78,118.4 r270 top
U24 "LM324AM" SOIC127P600X175-14N 51.165,40.294 r270 top
U25 "LM2904DR" SOIC127P599X175-8N 62.53,40.289 r270 top
U26 "SN74HC14N" N0014A 83.282,100.524 r90 top
U27 "SN74HC14N" N0014A 107.35,100.524 r90 top
X1 "USB-B1HSB6" OST_USB-B1HSB6 136.35,127.31 r180 top
X2 "HSE" XT3 55.6,78.078 r270 top value=4Mhz
Y1 "LSE" XTAL_ECS-.327-7-34B-TR 64.167,72.982 r90 top

## Footprints (in the part's own frame and the unit in brackets; to place one, negate y for a bottom-side part, rotate by r counter-clockwise, add the part's x,y. Pads: shape width x height; smd on the part's side, far side on the other; paste and mask are expansions set on the pad)
BAT_3002 [mm]
  rect 3.96x3.96 smd paste-3: N(0,0)
  rect 5.08x5.08 smd: P1(-12.825,0) P2(12.825,0)
  silkscreen extent -10.55,-10.57 10.56,9.29, body extent -15.37,-10.44 15.37,9.42, height 3.96
DIP762W50P254L495H455Q4 [mm]
  rect 1.26x1.26 / inner round 1.26 / far side rect 1.26x1.26 hole 0.84: 1(-3.81,1.27)
  round 1.26 hole 0.84: 2(-3.81,-1.27) 3(3.81,-1.27) 4(3.81,1.27)
  silkscreen extent -5.01,-2.3 3.25,2.3, body extent -3.94,-2.3 3.94,2.3, height 4.55
FP-4-5435640-1-MFG [mm]
  rect 1.39x1.39 hole 0.89 paste-2539.97 mask+0: 1(-3.81,11.43)
  round 1.39 hole 0.89 paste-2539.97 mask+0: 2(-3.81,8.89) 3(-3.81,6.35) 4(-3.81,3.81) 5(-3.81,1.27) 6(-3.81,-1.27) 7(-3.81,-3.81) 8(-3.81,-6.35) 9(-3.81,-8.89) 10(-3.81,-11.43) 11(3.81,-11.43) 12(3.81,-8.89) 13(3.81,-6.35) 14(3.81,-3.81) 15(3.81,-1.27) 16(3.81,1.27) 17(3.81,3.81) 18(3.81,6.35) 19(3.81,8.89) 20(3.81,11.43)
  silkscreen extent -5.8,-13.97 5.08,13.97, body extent -5.18,-14.07 5.18,14.07, height 0.25
FP-C0603C-CF-IPC_A [mil]
  rect 47.5x41.66 smd paste+0 mask+0: 1(-32.51,0) 2(32.51,0)
  silkscreen extent -56,-37 56,37, body extent -76,-41 76,41, height 10
FUSC3225X90N [mm]
  rrect25% 1.18x2.81 smd paste+0 mask+0.102: 1(-1.485,0) 2(1.485,0)
  silkscreen extent -0.58,-1.29 0.58,1.29, body extent -1.61,-1.29 1.61,1.29, height 0.9
HDR/Header/6 [mm]
  rrect50% 1.6x1.8 hole 1: 1(-6.35,0)
  oval 1.6x1.8 hole 1: 2(-3.81,0) 3(-1.27,0) 4(1.27,0) 5(3.81,0) 6(6.35,0)
  silkscreen extent -7.75,-1.4 7.62,1.27, body extent -7.62,-1.27 7.62,1.27, height 8.38
HDR/Header/8 [mm]
  rrect50% 1.6x1.8 hole 1: 1(-8.89,0)
  oval 1.6x1.8 hole 1: 2(-6.35,0) 3(-3.81,0) 4(-1.27,0) 5(1.27,0) 6(3.81,0) 7(6.35,0) 8(8.89,0)
  silkscreen extent -10.29,-1.4 10.16,1.27, body extent -10.16,-1.27 10.16,1.27, height 8.89
HDR/Terminal/2 [mil] "Header 2, 2 pin, hight 400mil, Pin to Pin 200mil, Colour Green"
  rect 110x120 hole 60: 1(-100,0)
  oval 110x120 hole 60: 2(100,0)
  silkscreen extent -200,-225 205,175, body extent -229,-218 200,168, height 559
HDR/Terminal/3 [mil]
  rect 110x120 hole 60: 1(-200,0)
  oval 110x120 hole 60: 2(0,0) 3(200,0)
  silkscreen extent -300,-225 305,175, body extent -329,-218 300,168, height 559
HDR/Terminal/4 [mil]
  rect 110x120 hole 60: 1(-300,0)
  oval 110x120 hole 60: 2(-100,0) 3(100,0) 4(300,0)
  silkscreen extent -400,-225 405,175, body extent -429,-218 400,168, height 559
HDR/Terminal/6 [mil]
  rect 110x120 hole 60: 1(-500,0)
  oval 110x120 hole 60: 2(-300,0) 3(-100,0) 4(100,0) 5(300,0) 6(500,0)
  silkscreen extent -600,-225 605,175, body extent -629,-218 600,168, height 559
N0014A [mm] "DIP, 14-Leads, Body 19.7x6.6mm, Pitch 2.54mm"
  rect 1.5x1.5 hole 0.9: 1(-3.81,7.62)
  round 1.5 hole 0.9: 2(-3.81,5.08) 3(-3.81,2.54) 4(-3.81,0) 5(-3.81,-2.54) 6(-3.81,-5.08) 7(-3.81,-7.62) 8(3.81,-7.62) 9(3.81,-5.08) 10(3.81,-2.54) 11(3.81,0) 12(3.81,2.54) 13(3.81,5.08) 14(3.81,7.62)
  silkscreen extent -3.93,-9.85 2.65,9.85, body extent -3.95,-9.85 3.95,9.85, height 5.08
OST_USB-B1HSB6 [mm]
  rect 1.428x1.428 / inner round 1.428 / far side rect 1.428x1.428 hole 0.92: 1(1.25,4.71)
  round 1.428 hole 0.92: 2(-1.25,4.71) 3(-1.25,2.71) 4(1.25,2.71)
  round 3.346 hole 2.33: P1(-6.02,0) P2(6.02,0)
  silkscreen extent -6.05,-10.3 6.05,6.2, body extent -7.42,-8.25 7.42,8.25, height 10.9
QFP50P1600X1600X160-100N [mm]
  rect 1.56x0.28 smd: 1(-7.68,6) 2(-7.68,5.5) 3(-7.68,5) 4(-7.68,4.5) 5(-7.68,4) 6(-7.68,3.5) 7(-7.68,3) 8(-7.68,2.5) 9(-7.68,2) 10(-7.68,1.5) 11(-7.68,1) 12(-7.68,0.5) 13(-7.68,0) 14(-7.68,-0.5) 15(-7.68,-1) 16(-7.68,-1.5) 17(-7.68,-2) 18(-7.68,-2.5) 19(-7.68,-3) 20(-7.68,-3.5) 21(-7.68,-4) 22(-7.68,-4.5) 23(-7.68,-5) 24(-7.68,-5.5) 25(-7.68,-6) 51(7.68,-6) 52(7.68,-5.5) 53(7.68,-5) 54(7.68,-4.5) 55(7.68,-4) 56(7.68,-3.5) 57(7.68,-3) 58(7.68,-2.5) 59(7.68,-2) 60(7.68,-1.5) 61(7.68,-1) 62(7.68,-0.5) 63(7.68,0) 64(7.68,0.5) 65(7.68,1) 66(7.68,1.5) 67(7.68,2) 68(7.68,2.5) 69(7.68,3) 70(7.68,3.5) 71(7.68,4) 72(7.68,4.5) 73(7.68,5) 74(7.68,5.5) 75(7.68,6)
  rect 0.28x1.56 smd: 26(-6,-7.68) 27(-5.5,-7.68) 28(-5,-7.68) 29(-4.5,-7.68) 30(-4,-7.68) 31(-3.5,-7.68) 32(-3,-7.68) 33(-2.5,-7.68) 34(-2,-7.68) 35(-1.5,-7.68) 36(-1,-7.68) 37(-0.5,-7.68) 38(0,-7.68) 39(0.5,-7.68) 40(1,-7.68) 41(1.5,-7.68) 42(2,-7.68) 43(2.5,-7.68) 44(3,-7.68) 45(3.5,-7.68) 46(4,-7.68) 47(4.5,-7.68) 48(5,-7.68) 49(5.5,-7.68) 50(6,-7.68) 76(6,7.68) 77(5.5,7.68) 78(5,7.68) 79(4.5,7.68) 80(4,7.68) 81(3.5,7.68) 82(3,7.68) 83(2.5,7.68) 84(2,7.68) 85(1.5,7.68) 86(1,7.68) 87(0.5,7.68) 88(0,7.68) 89(-0.5,7.68) 90(-1,7.68) 91(-1.5,7.68) 92(-2,7.68) 93(-2.5,7.68) 94(-3,7.68) 95(-3.5,7.68) 96(-4,7.68) 97(-4.5,7.68) 98(-5,7.68) 99(-5.5,7.68) 100(-6,7.68)
  silkscreen extent -9.56,-7 7,7, body extent -8,-8 8,8, height 1.6
SMC [mm]
  rect 2.8x3.8 smd: A(3.7,0) C(-3.7,0)
  silkscreen extent -3.56,-3.11 3.56,3.11, body extent -3.97,-2.95 3.97,2.95, height 2.5
SOIC127P599X175-8N [mm]
  rrect25% 1.97x0.6 smd paste+0 mask+0.102: 1(-2.47,1.905) 2(-2.47,0.635) 3(-2.47,-0.635) 4(-2.47,-1.905) 5(2.47,-1.905) 6(2.47,-0.635) 7(2.47,0.635) 8(2.47,1.905)
  silkscreen extent -4.14,-2.52 1.95,2.52, body extent -3,-2.45 3,2.45, height 1.75
SOIC127P600X175-14N [mm]
  rrect50% 1.97x0.6 smd paste+0 mask+0.102: 1(-2.475,3.81) 2(-2.475,2.54) 3(-2.475,1.27) 4(-2.475,0) 5(-2.475,-1.27) 6(-2.475,-2.54) 7(-2.475,-3.81) 8(2.475,-3.81) 9(2.475,-2.54) 10(2.475,-1.27) 11(2.475,0) 12(2.475,1.27) 13(2.475,2.54) 14(2.475,3.81)
  silkscreen extent -4.15,-4.33 1.17,4.33, body extent -3,-4.33 3,4.33, height 1.75
SOT95P230X110-3N [mm]
  rrect25% 1.26x0.59 smd: 1(-0.98,0.95) 2(-0.98,-0.95) 3(0.98,0)
  silkscreen extent -2.48,-1.45 0.65,1.45, body extent -1.15,-1.45 1.15,1.45, height 1.1
SOT95P240X111-3N [mm]
  rrect25% 1.23x0.6 smd: 1(-1.06,0.95) 2(-1.06,-0.95) 3(1.06,0)
  silkscreen extent -2.35,-1.45 0.65,1.45, body extent -1.2,-1.45 1.2,1.45, height 1.11
SOT95P280X145-5N [mm]
  rrect25% 1.39x0.58 smd: 1(-1.165,0.95) 2(-1.165,0) 3(-1.165,-0.95) 4(1.165,-0.95) 5(1.165,0.95)
  silkscreen extent -2.51,-1.45 0.8,1.45, body extent -1.35,-1.45 1.35,1.45, height 1.45
SW1-SMD [mm]
  rect 1.2x0.8 smd: 1(-3.5,0) 2(3.5,0)
  silkscreen extent -2.82,-1.85 2.82,1.85, body extent -3.05,-1.85 3.05,1.85, height 2.5
TRANS_BUK9M15-60EX [mm]
  rect 0.83x0.4 smd paste-1 mask+0.05: 1(-1.535,0.975) 2(-1.535,0.325) 3(-1.535,-0.325) 4(-1.535,-0.975)
  rect 1x1 smd paste-1 mask+0: 5(0.405,0)
  [L1] Top region: 1.95,0.775 1.33,0.775 1.33,0.525 1.95,0.525 1.95,0.125 1.33,0.125 1.33,-0.125 1.95,-0.125 1.95,-0.525 1.33,-0.525 1.33,-0.775 1.95,-0.775 1.95,-1.175 1.2,-1.175 1.2,-1.125 -0.52,-1.125 -0.52,1.125 1.2,1.125 1.2,1.175 1.95,1.175
  silkscreen extent -2.6,-1.65 1.3,1.65, body extent -1.65,-1.65 1.65,1.65, height 0.9
"tro smd 0603" [mm]
  rect 1x0.95 smd mask+0.076: 1(-0.75,0) 2(0.75,0)
  silkscreen extent -1.35,-0.58 1.37,0.58, body extent -0.82,-0.42 0.82,0.43, height 0.44
WL-SMCW_0603_150060xx75000 [mm]
  rrect50% 0.85x0.95 smd: 1(-0.775,0) 2(0.775,0)
  silkscreen extent -1.4,-0.7 0.9,0.7, body extent -0.8,-0.4 0.8,0.4, height 0.7
XT3 [mil]
  round 75 hole 34: 1(-100,0) 2(100,0) 3(0,0)
  silkscreen extent -216,-60 211,60, body extent -212,-60 208,60, height 127
XTAL_ECS-.327-7-34B-TR [mm]
  rect 1.1x1.9 smd: 1(-1.25,0) 2(1.25,0)
  silkscreen extent -0.44,-0.75 0.44,0.75, body extent -1.6,-0.75 1.6,0.75, height 0.9

## Part data
BT1: "Battery Holder: SMT, 1 Coin Cell, 20mm, PhosBronze/Tin-Nickel", PACKAGE="NON STANDARD-2 Keystone", Check_prices=https://www.snapeda.com/parts/3002/Keystone/view-part/?ref=eda, MF="Keystone Electronics Corp.", MP=3002, SnapEDA_Link=https://www.snapeda.com/parts/3002/Keystone/view-part/?ref=snap
C1 C2 C3 C4 C5 C6 C7 C8 C9 C10 C11 C12 C13 C14 C15 C16 C17 C18 C19 C20 C21 C22 C23 C24 C25 C26 C27 C28 C29 C30 C31 C32 C33 C34 C35 C36: library part CN-SEMI-DIP, "Capacitor (Semiconductor SIM Model)", LatestRevisionDate=17-Jul-2002, LatestRevisionNote="Re-released for DXP Platform.", PackageReference=C1206, Publisher="Altium Limited"
CAN Digital Input P2 P8 PULSE SDADC STLINK2: library part "Header 6", "Header, 6-Pin"
D1: library part NUP2105L, Mouser Eletronics=755-MMBZ6V8ALFHT116
D2 D3 D4 D5 D6 D7 D8 D9 D10 D11 D12 D13 D14 D15 D16 D17 D18 D19 D20 D21 D22 D23: PACKAGE=None, Availability=Unavailable, MP=BZX84C3V6LT1G, Price=None
D24: "Diode Schottky 60 V 5A Surface Mount SMC", PACKAGE="SMC-2 Diodes", Check_prices=https://www.snapeda.com/parts/B560C-13-F/Diodes+Inc./view-part/?ref=eda, MF="Diodes Inc.", MP=B560C-13-F, SnapEDA_Link=https://www.snapeda.com/parts/B560C-13-F/Diodes+Inc./view-part/?ref=snap
D25 D26 D27: library part CMP-1426-00002-4, "430mcd Colorless transparence 520nm Emerald 140° LED0603 Light Emitting Diodes (LED) ROHS", Case Code (Imperial)=0603, Case Code (Metric)=1608, Color=Green, Forward Current=100mA, Forward Voltage=3.2V, Max Junction Temperature (Tj)=95°C, Max Operating Temperature=85°C, Max Reverse Voltage (DC)=5V, Min Operating Temperature=-40°C, Output Current=10µA, Power Dissipation=105mW, Test Current=20mA, Case/Package=0603, Dominant Wavelength=525nm, Height=700µm, Lead Free="Lead Free", Length=1.6mm, Lens Style="Clear, Rectangular", Luminous Intensity=430mcd, Mount="Surface Mount", Packaging="Tape and Reel", Peak Wavelength=515nm, REACH SVHC=Unknown, Reverse Voltage=5V, RoHS=Compliant, Viewing Angle=140°, Wavelength=525nm, Width=800µm
DAC: library part "Header 3", "Header, 3-Pin"
DSDADC P10: library part "Header 4", "Header, 4-Pin"
F1 F2 F3 F4 F5 F6 F7 F8 F9 F10 F11 F12 F13 F14 F15 F16 F17 F18 F19 F20 F21 F22 F23 F24 F25 F26 F27 F28 F29 F30: "1210 SMT PPTC", PACKAGE=Package, Check_prices=https://www.snapeda.com/parts/0ZCH0150FF2E/Bel+Circuit+Protection/view-part/?ref=eda, MF="Bel Fuse", MP=0ZCH0150FF2E, SnapEDA_Link=https://www.snapeda.com/parts/0ZCH0150FF2E/Bel+Circuit+Protection/view-part/?ref=snap
JP1: library part Header8, "Connector 8"
P9 PWR: library part "Header 2", "Header, 2-Pin"
Q1 Q2 Q3 Q4 Q5 Q6 Q7 Q8: "Bá»™ chuyá»ƒn Ä‘á»•i N-Channel 60 V 47A (Tc) 75W (Tc) gáº¯n bá» máº·t LFPAK33", PACKAGE="LFPAK33-8 Nexperia USA Inc.", Check_prices=https://www.snapeda.com/parts/BUK9M15-60EX/Nexperia/view-part/?ref=eda, MF="Nexperia USA", MP=BUK9M15-60EX, SnapEDA_Link=https://www.snapeda.com/parts/BUK9M15-60EX/Nexperia/view-part/?ref=snap
Q9 Q10 Q11: library part BC847, LCSC=C2145
R1 R2 R3 R4 R5 R6 R7 R8 R9 R10 R11 R12 R13 R14 R15 R16 R17 R18 R19 R20 R21 R22 R23 R24 R25 R26 R27 R28 R29 R30 R31 R32 R33 R34 R35 R36 R37 R38 R39 R40 R41 R42 R43 R44 R45 R46 R47 R48 R49 R50 R51 R52 R53 R54 R55 R56 R57 R58 R59 R60 R61 R62 R63 R64 R65 R66 R67 R68 R69 R70 R71 R72 R73 R74 R75 R76 R77 R78 R79 R80 R81 R82 R83 R84 R85 R86 R87 R88 R89 R90 R91 R92 R93 R94 R95 R96 R97 R98 R99 R100 R101 R102 R103 R104 R105 R106 R107 R108 R109 R110 R111 R112 R113 R114 R115 R116 R117 R118 R119 R120 R121 R122 R123 R124: library part "Tro 0603 1% 10k", "RES", Chung_Loai=Dán, Don_Vi=Con, Ma_Hang=MH006333, So_Chan=2, Ten_Linh_Kien="Trở 0603 1% 10k"
SW1: library part SW2, "Switch button 2 pin"
SW2: library part CMP-03400-000018-1, "SWITCH ROCKER DIP SPST 60MA 5V", Contact Current Rating=1A, Housing Color=Blue, Max Operating Temperature=105°C, Min Operating Temperature=-55°C, Package Quantity=11, Voltage Rating (DC)=40V, Actuator Type=Rocker, Contact Material="Copper Alloy", Contact Plating=Gold, Contact Post Length=0.14inch, ELV=Compliant, Height=0.34inch, Housing Material=Polyester, Lead Free="Lead Free", Length=27.43mm, Mount="Through Hole", Number of Circuits=10, Number of Positions=10, Orientation=Straight, Packaging=Rail/Tube, Pitch=0.1inch, Radiation Hardening=No, RoHS Compliant=Yes, Sealable="Yes (With)", Series=7100, Terminal Pitch=2.54mm, Termination="PC Pins", Throw Configuration=SPST, TYPE=Switch, Washable=Yes
U1: "Linear Voltage Regulator IC Positive Fixed 1 Output 300mA SOT-23-5", PACKAGE="SOT-23 Microchip", Check_prices=https://www.snapeda.com/parts/MIC5504-3.3YM5%20TR/Microchip/view-part/?ref=eda, MF=Microchip, MP="MIC5504-3.3YM5 TR", SnapEDA_Link=https://www.snapeda.com/parts/MIC5504-3.3YM5%20TR/Microchip/view-part/?ref=snap
U3: "3.3-V CAN Transceivers", PACKAGE="SOIC-8 Texas Instruments", Check_prices=https://www.snapeda.com/parts/TCAN332D/Texas+Instruments/view-part/?ref=eda, MF="Texas Instruments", MP=TCAN332D, SnapEDA_Link=https://www.snapeda.com/parts/TCAN332D/Texas+Instruments/view-part/?ref=snap
U4 U5 U6 U7 U8 U9 U10 U11 U12 U13 U14 U15 U16 U17 U18 U19 U20 U21 U22 U23: "Optoisolator Transistor Output - 1 Channel 4-DIP", PACKAGE="DIP-4 Sharp Microelectronics", Availability="In Stock", Check_prices=https://www.snapeda.com/parts/PC817X3NSZ1B/Sharp+Microelectronics/view-part/?ref=eda, MF="Sharp Microelectronics", MP=PC817X3NSZ1B, Price=None, Purchase-URL=https://pricing.snapeda.com/search/part/PC817X3NSZ1B/?ref=eda, SnapEDA_Link=https://www.snapeda.com/parts/PC817X3NSZ1B/Sharp+Microelectronics/view-part/?ref=snap
U24: library part LM324AM/NOPB, "Low power general-purpose quad operational amplifier 14-SOIC 0 to 70", PACKAGE="SOIC-14 Texas Instruments", Check_prices=https://www.snapeda.com/parts/LM324AM/Texas+Instruments/view-part/?ref=eda, MF="Texas Instruments", MP=LM324AM, SnapEDA_Link=https://www.snapeda.com/parts/LM324AM/Texas+Instruments/view-part/?ref=snap
U25: "Dual, 26-V, 700-kHz operational amplifier", PACKAGE="SOIC-8 Texas Instruments", Check_prices=https://www.snapeda.com/parts/LM2904DR/Texas+Instruments/view-part/?ref=eda, MF="Texas Instruments", MP=LM2904DR, SnapEDA_Link=https://www.snapeda.com/parts/LM2904DR/Texas+Instruments/view-part/?ref=snap
U26 U27: library part CMP-1615-00889-3, "Hex Schmitt-Trigger Inverters, N0014A, TUBE", F @ Nom Voltage(Max)(Mhz)=20, Generic Part Number=SN74HC14, ICC @ Nom Voltage(Max)(mA)=0.02, Manufacturer="Texas Instruments", Operating Temperature Range(C)="-40 to 85", Rating=Catalog, tpd @ Nom Voltage(Max)(ns)=31, Voltage(Nom)(V)=5, Bits(#)=6, Code_JEDEC=MS-001, DatasheetVersion=SCLS085G, Input Type=CMOS, Output Drive (IOL/IOH)(Max)(mA)=-4/4, Output Type=CMOS, PackageReference=N0014A, Schmitt Trigger=Yes, Technology Family=HC, VCC(Max)(V)=6, VCC(Min)(V)=2
X1: "USB-B (USB TYPE-B) - Receptacle Connector 4 Position Through Hole, Right Angle", PACKAGE=None, Availability="In Stock", Check_prices=https://www.snapeda.com/parts/USB-B1HSB6/On+Shore+Technology+Inc./view-part/?ref=eda, MF="On Shore", MP=USB-B1HSB6, Price=None, Purchase-URL=https://pricing.snapeda.com/search/part/USB-B1HSB6/?ref=eda, SnapEDA_Link=https://www.snapeda.com/parts/USB-B1HSB6/On+Shore+Technology+Inc./view-part/?ref=snap
X2: library part XT3, "Crystal For all Crystal 2pin."
Y1: library part ECS-.327-7-34B-TR, "32.768 kHz Â±20ppm Crystal 7pF 70 kOhms 2-SMD, No Lead", PACKAGE="ECX-31B-34B-2 ECS", Check_prices=https://www.snapeda.com/parts/ECS-.327-7-34B-TR/ECS/view-part/?ref=eda, MF="ECS Inc.", MP=ECS-.327-7-34B-TR, SnapEDA_Link=https://www.snapeda.com/parts/ECS-.327-7-34B-TR/ECS/view-part/?ref=snap

## Free pads (board coordinates)
  round 5 hole 2.7 unplated: 11(15,133.5) 11(15.1,9.7) 11(148.7,133) 11(148.9,37.8)

## Via types
v1: diameter 0.8, hole 0.4, [L1] Top to [L4] BOTTOM, tented both sides, 816 vias
v2: diameter 0.8, hole 0.4, [L1] Top to [L4] BOTTOM, 223 vias
v3: diameter 1.27, hole 0.711, [L1] Top to [L4] BOTTOM, 5 vias
v4: diameter 0.8, hole 0.3, [L1] Top to [L4] BOTTOM, 2 vias

## Nets (pads, with @x,y where several pads share a name; then routed paths per layer and width w, separated by ;. In a path a pad name is that pad's centre, name@x,y a point inside that pad or via, vN(x,y) a via of type N, cw(c..) or ccw(c..) an arc to the next point about the centre after c; other vN are vias at no path point)
+3,3V: C1.2 C2.2 C3.2 C4.2 C5.2 C6.2 C7.2 C8.2 C9.2 C10.2 C14.2 C15.2 C16.2 C17.2 C18.2 C19.2 C20.2 C21.2 C22.2 C23.2 C30.2 JP1.8 R1.1 R8.2 R10.2 R12.2 R14.2 R16.2 R18.2 R20.2 R22.2 R24.2 R26.2 R64.2 R66.2 R68.2 R70.2 R72.2 R74.2 R76.2 R78.2 R80.2 R82.2 STLINK2.1 U1.5 U2.21 U2.22 U2.28 U2.50 U2.51 U2.52 U2.75 U2.100 U3.3 | length 242.4
  [L1] Top w0.32: v2@42.7,89.7 44.752,89.7 47.025,91.973 R20.2@47.025,91.998 ; v2(42.727,89.625) 42.727,88.515 44.741,86.502 R16.2@47.025,86.502 ; v2@42.9,78.3 44.847,78.3 47.025,80.478 R12.2@47.025,80.503 ; v2(42.927,78.225) 42.927,76.885 44.311,75.502 46.71,75.502 47.025,75.187 R8.2@47.025,75.162 ; v2@43.2,101.1 44.797,101.1 47.025,103.328 R10.2@47.025,103.353 ; v2@43.2,112.6 45.24,112.6 46.685,114.045 46.71,114.045 47.025,114.36 R18.2@47.025,114.385 ; v2(43.216,101.061) 43.216,99.457 44.777,97.896 46.71,97.896 47.025,97.581 R24.2@47.025,97.556 ; v2(43.227,112.525) 43.227,110.875 44.645,109.458 46.71,109.458 47.025,109.143 R14.2@47.025,109.118 ; R22.2@47.025,120.423 47.025,120.448 46.71,120.763 44.77,120.763 42.7,122.833 v2(42.7,124) 45.013,124 46.685,125.672 46.71,125.672 47.025,125.987 R26.2@47.025,126.012 ; U3.3@61.822,104.727 C30.2@61.822,101 67.7,101 68,101.3 v3(68,109) 68,110.413 68.187,110.6 70.25,110.6 R64.2@70.45,110.8 70.5,110.75 70.5,109.787 70.687,109.6 75.2,109.6 ; C21.2@67.7,58.226 C21.2@67.7,58.231 ; C20.2@71.8,58.526 72.099,58.824 72.099,59.399 73.732,61.032 U2.22@77.156,61.032 ; C20.2@71.8,58.6 71.7,58.5 v3(69.7,58.5) 67.969,58.5 C21.2@67.7,58.231 ; R70.2@75.335,110.8 75.2,110.665 75.2,109.6 ; v2(75.8,78.3) C3.2@75.8,80.548 75.8,80.622 77.378,82.2 C1.2@78.574,82.2 C2.2@78.574,78.8 78.836,78.538 U2.100@78.836,73.212 ; U2.21@77.156,61.532 75.868,61.532 75.526,61.874 67.7,61.874 C17.2@67.7,61.674 C21.2@67.7,58.526 C21.2@67.7,58.231 ; v3@78.1,45.1 78.036,45.164 C6.2@78.036,47.5 C4.2@78.036,50.2 78.036,53.1 78.036,54.732 79.836,56.532 U2.28@79.836,57.852 ; R76.2@80.415,110.8 80.415,109.615 80.4,109.6 ; R80.2@85.495,110.8 85.495,109.605 85.5,109.6 ; U2.50@90.836,57.852 90.836,57.252 91.4,56.688 91.4,54.226 C18.2@91.1,53.926 ; R66.2@90.85,110.8 90.85,109.65 90.9,109.6 ; C18.2@91.1,53.9 v2(93,53.9) ; U2.51@92.516,59.532 94.868,59.532 95.6,58.8 97.074,58.8 C22.2@97.1,58.826 98.796,58.826 98.97,59 99.23,59 99.41,58.82 100.794,58.82 C23.2@100.8,58.826 100.8,58.9 102.2,60.3 102.2,60.794 ; U2.52@92.516,60.032 93.832,60.032 95.832,62.032 C14.2@97.1,62.032 97.2,61.932 97.2,60.787 97.387,60.6 102.006,60.6 102.2,60.794 ; U2.75@92.516,71.532 94.368,71.532 95.671,72.835 C9.2@96.774,72.835 ; v2@92.95,53.85 v2(93,53.9) ; C19.2@94.836,53.926 94.81,53.9 v2(93,53.9) ; R72.2@96.05,110.8 96.05,109.65 96.1,109.6 ; C7.2@96.748,76.4 96.748,75.152 97.385,74.515 98.385,74.515 v4(98.5,74.4) 98.5,73.013 98.213,72.726 ; C9.2@96.763,72.789 C9.2@96.7,72.726 98.213,72.726 ; C8.2@100.3,72.726 98.213,72.726 ; R78.2@100.95,110.8 100.95,109.65 101,109.6 ; C15.2@102.2,62.032 102.2,60.794 ; v4@103.4,71.5 104.75,71.5 R1.1@104.9,71.35 ; R82.2@105.85,110.8 105.85,109.65 105.8,109.6 ; R68.2@110.85,110.8 110.85,109.65 110.9,109.6 ; R74.2@116.05,110.8 116.025,110.8 114.825,109.6 110.9,109.6 ; v2(132.8,111.5) 132.8,113.426 C10.2@132.726,113.5 134.063,113.5 134.733,112.83 135.626,112.83 135.85,113.054 135.85,113.305 136.38,113.835 U1.5@137.15,113.835 ; 75.2,109.6 80.4,109.6 ; 80.4,109.6 85.5,109.6 ; 85.5,109.6 90.9,109.6 ; 90.9,109.6 96.1,109.6 ; 96.1,109.6 101,109.6 ; 101,109.6 105.8,109.6 ; 105.8,109.6 110.9,109.6
  other v2: 99.1,59
  other v3: 78,45.2
  other v4: 103.3,71.6